# Altium PCB DragonFly.PcbDoc (part 1 of 2)
Units mil, origin at the board's own origin, x right, y up, seen from the top; angles counter-clockwise.
Board outline 3771.33 x 3716.36 mil, 4 copper layers (Top Layer, Signal Layer 1, Signal Layer 2, Bottom Layer), stack 47.519 mil thick; 111 components, 70 nets, 378 pads, 144 vias.
Unrouted connection lines stored in the file: 86.
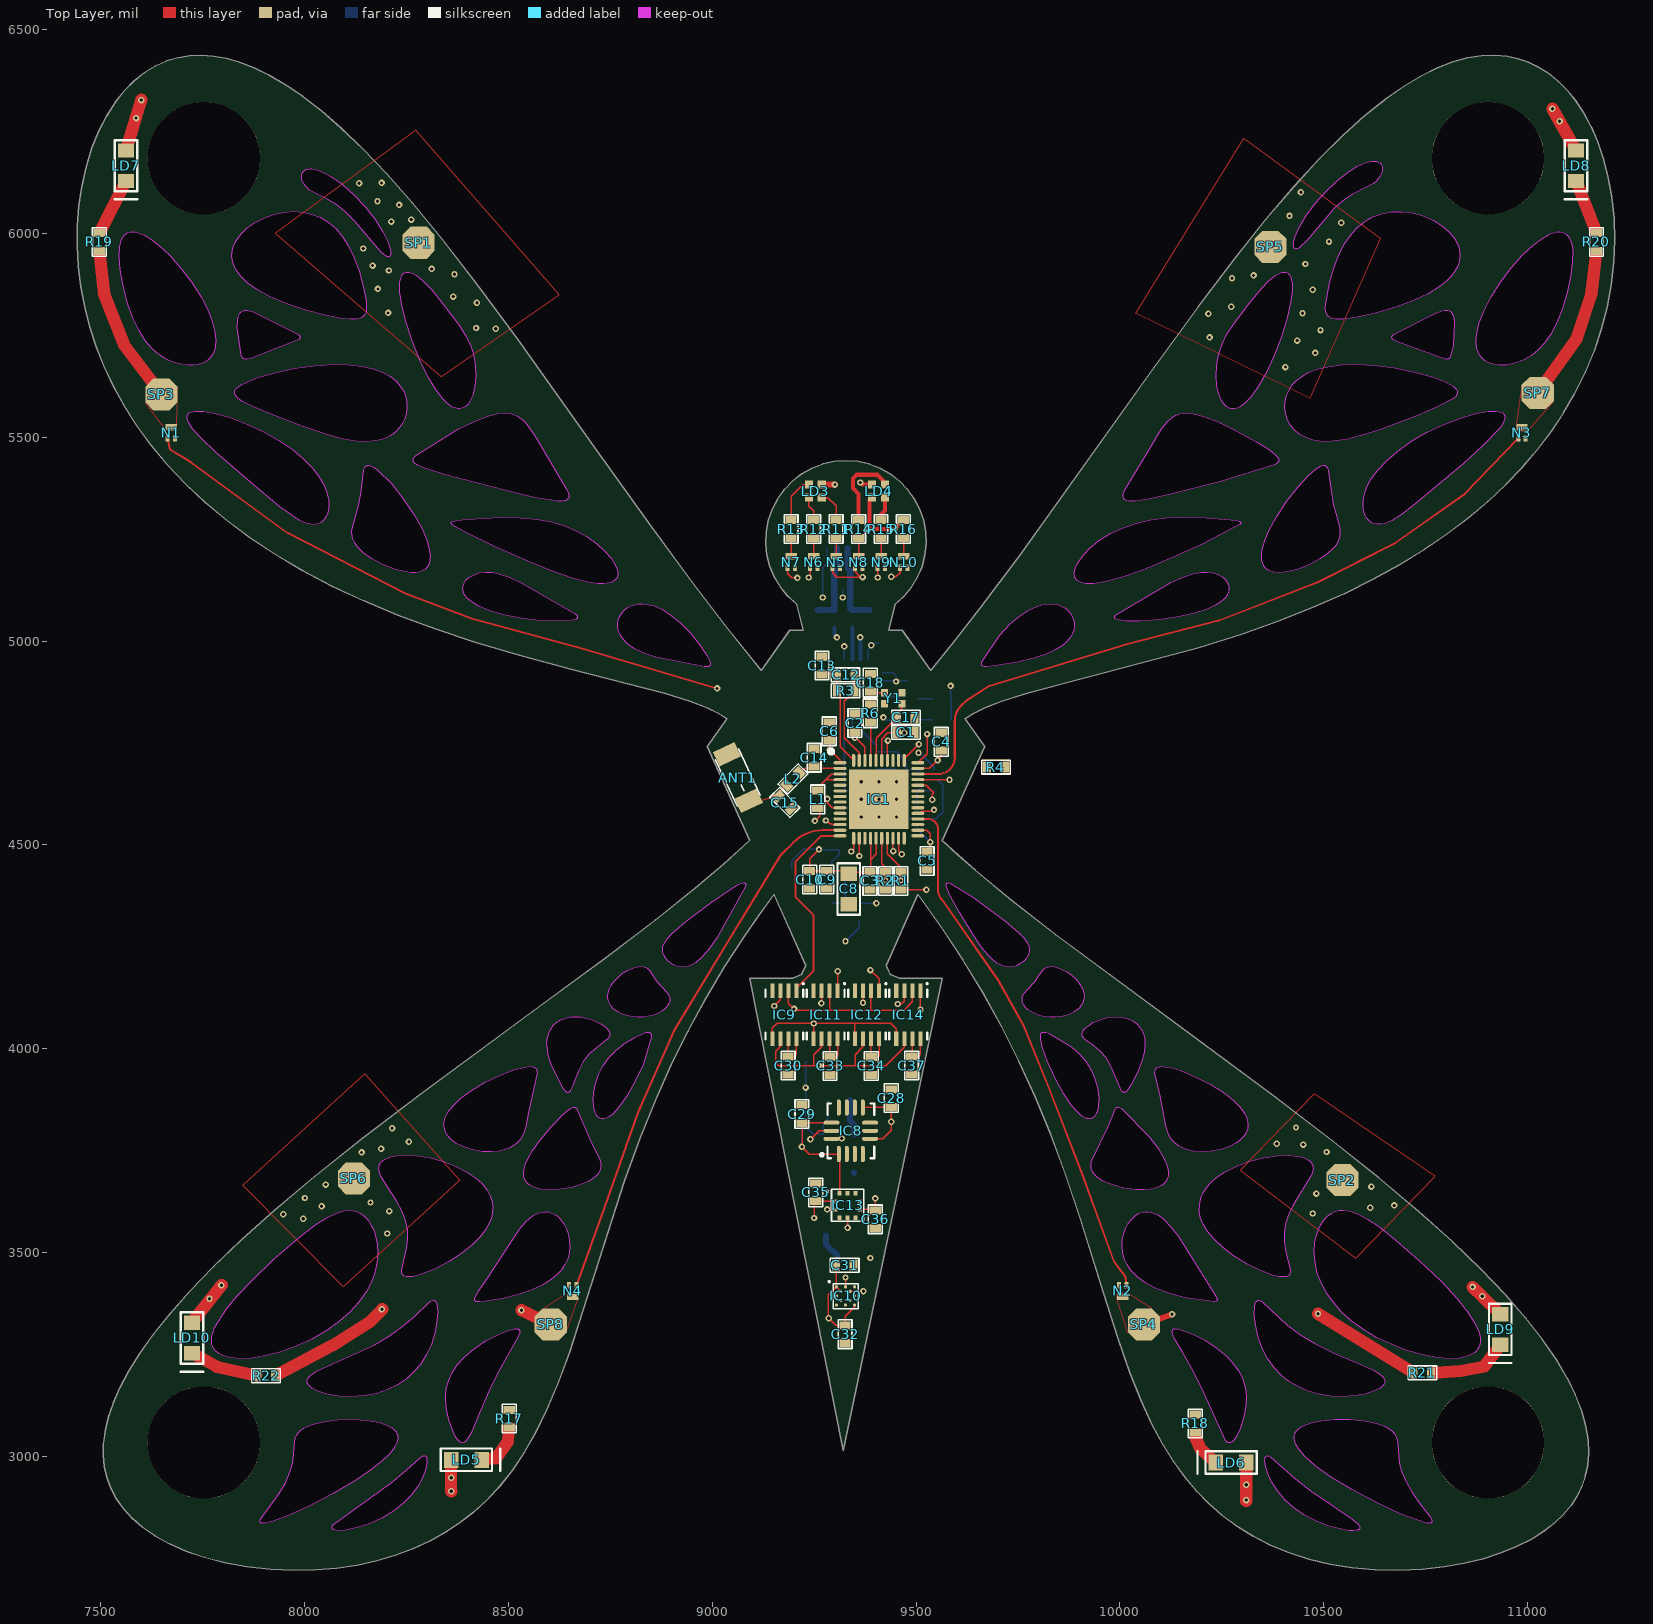
[diagram p0: Top Layer view]
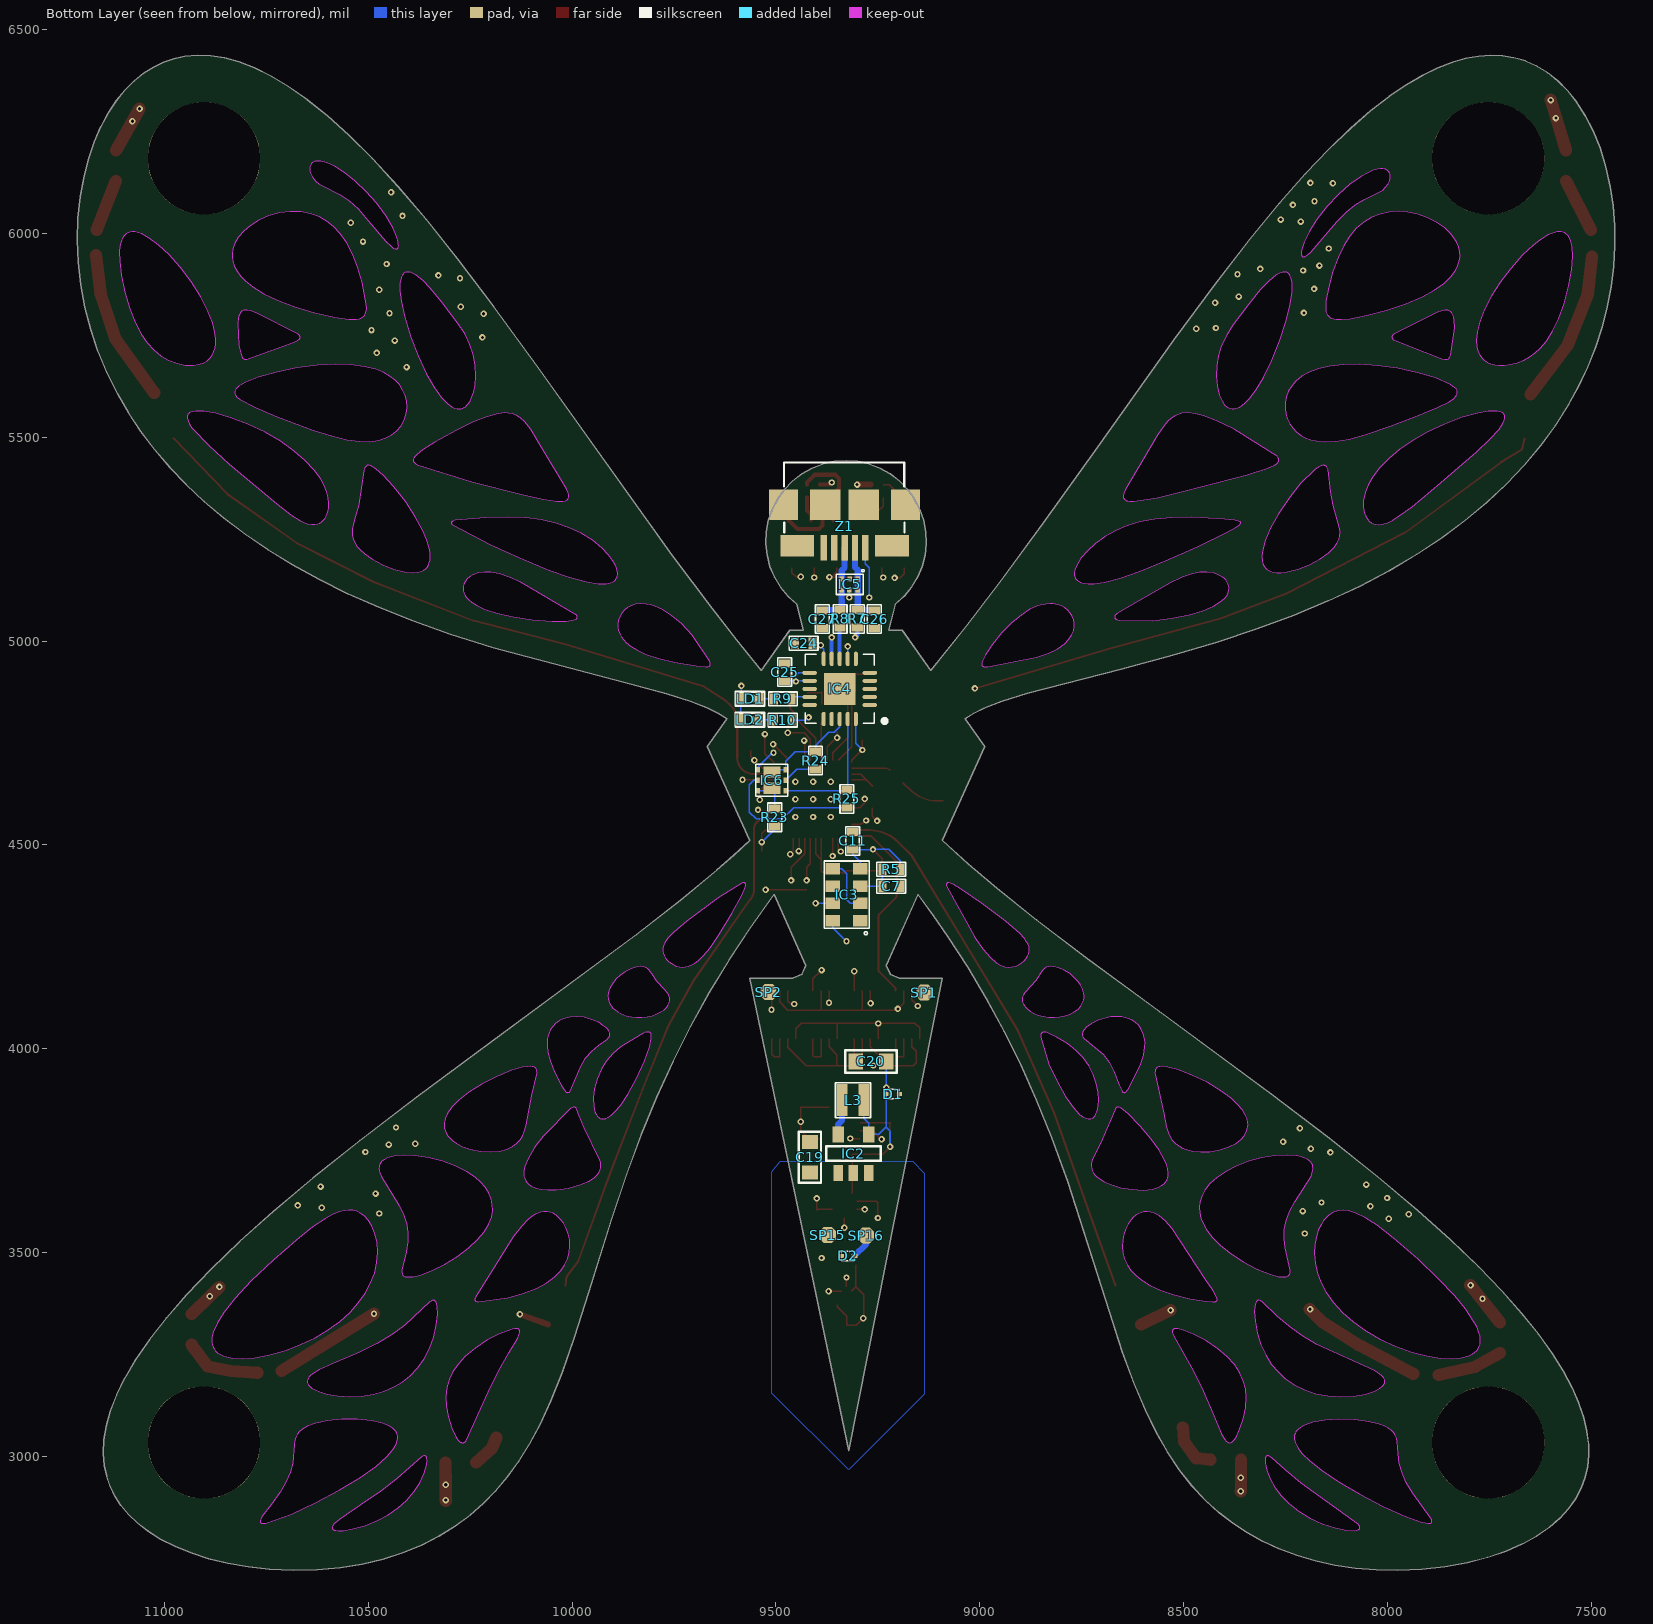
[diagram p1: Bottom Layer view, seen from below]
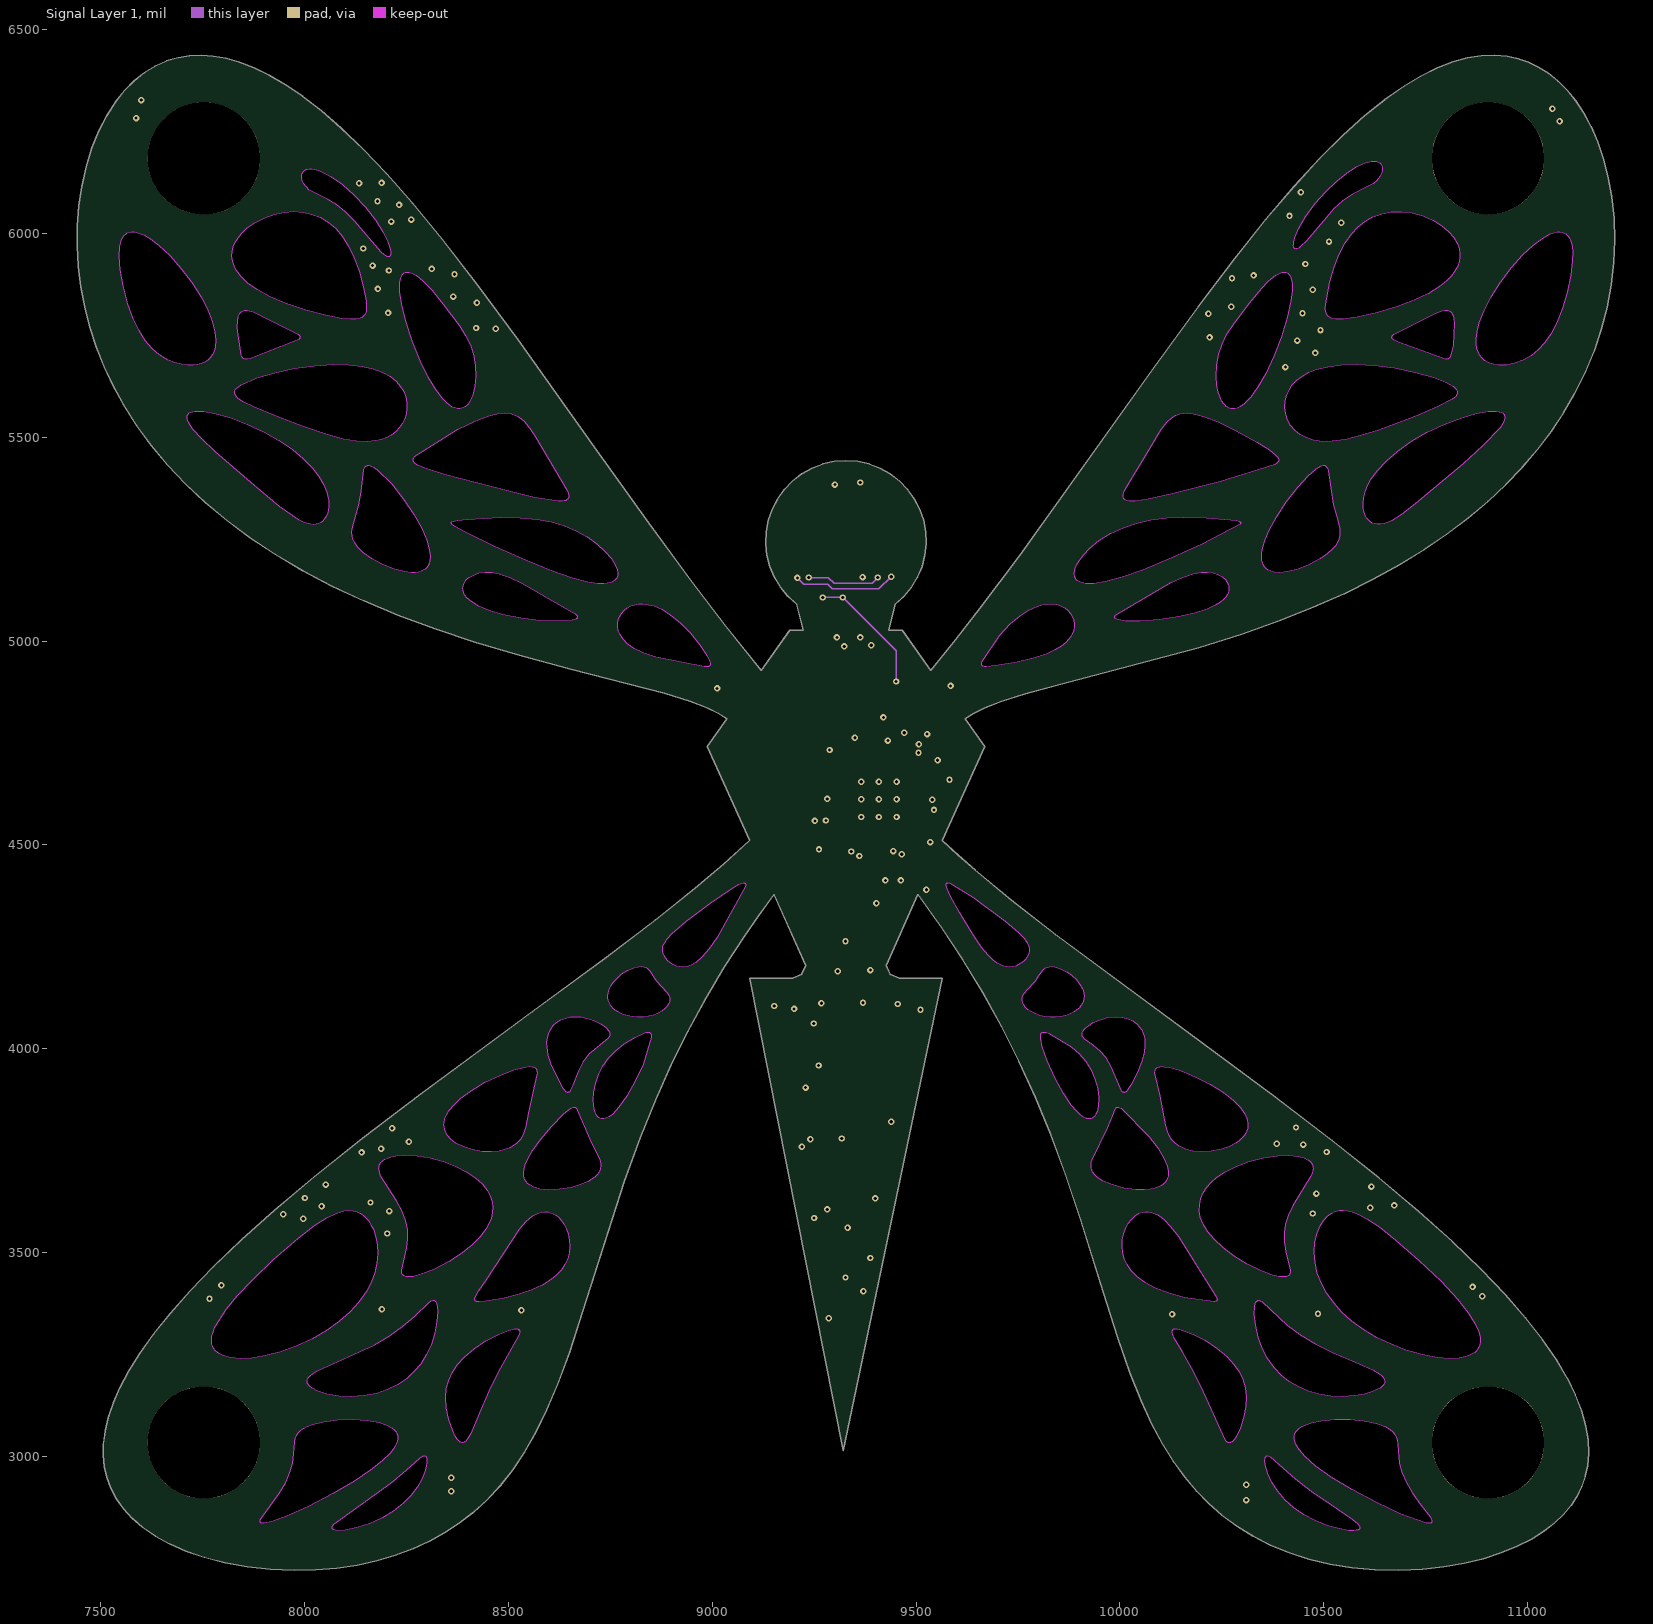
[diagram p2: Signal Layer 1]
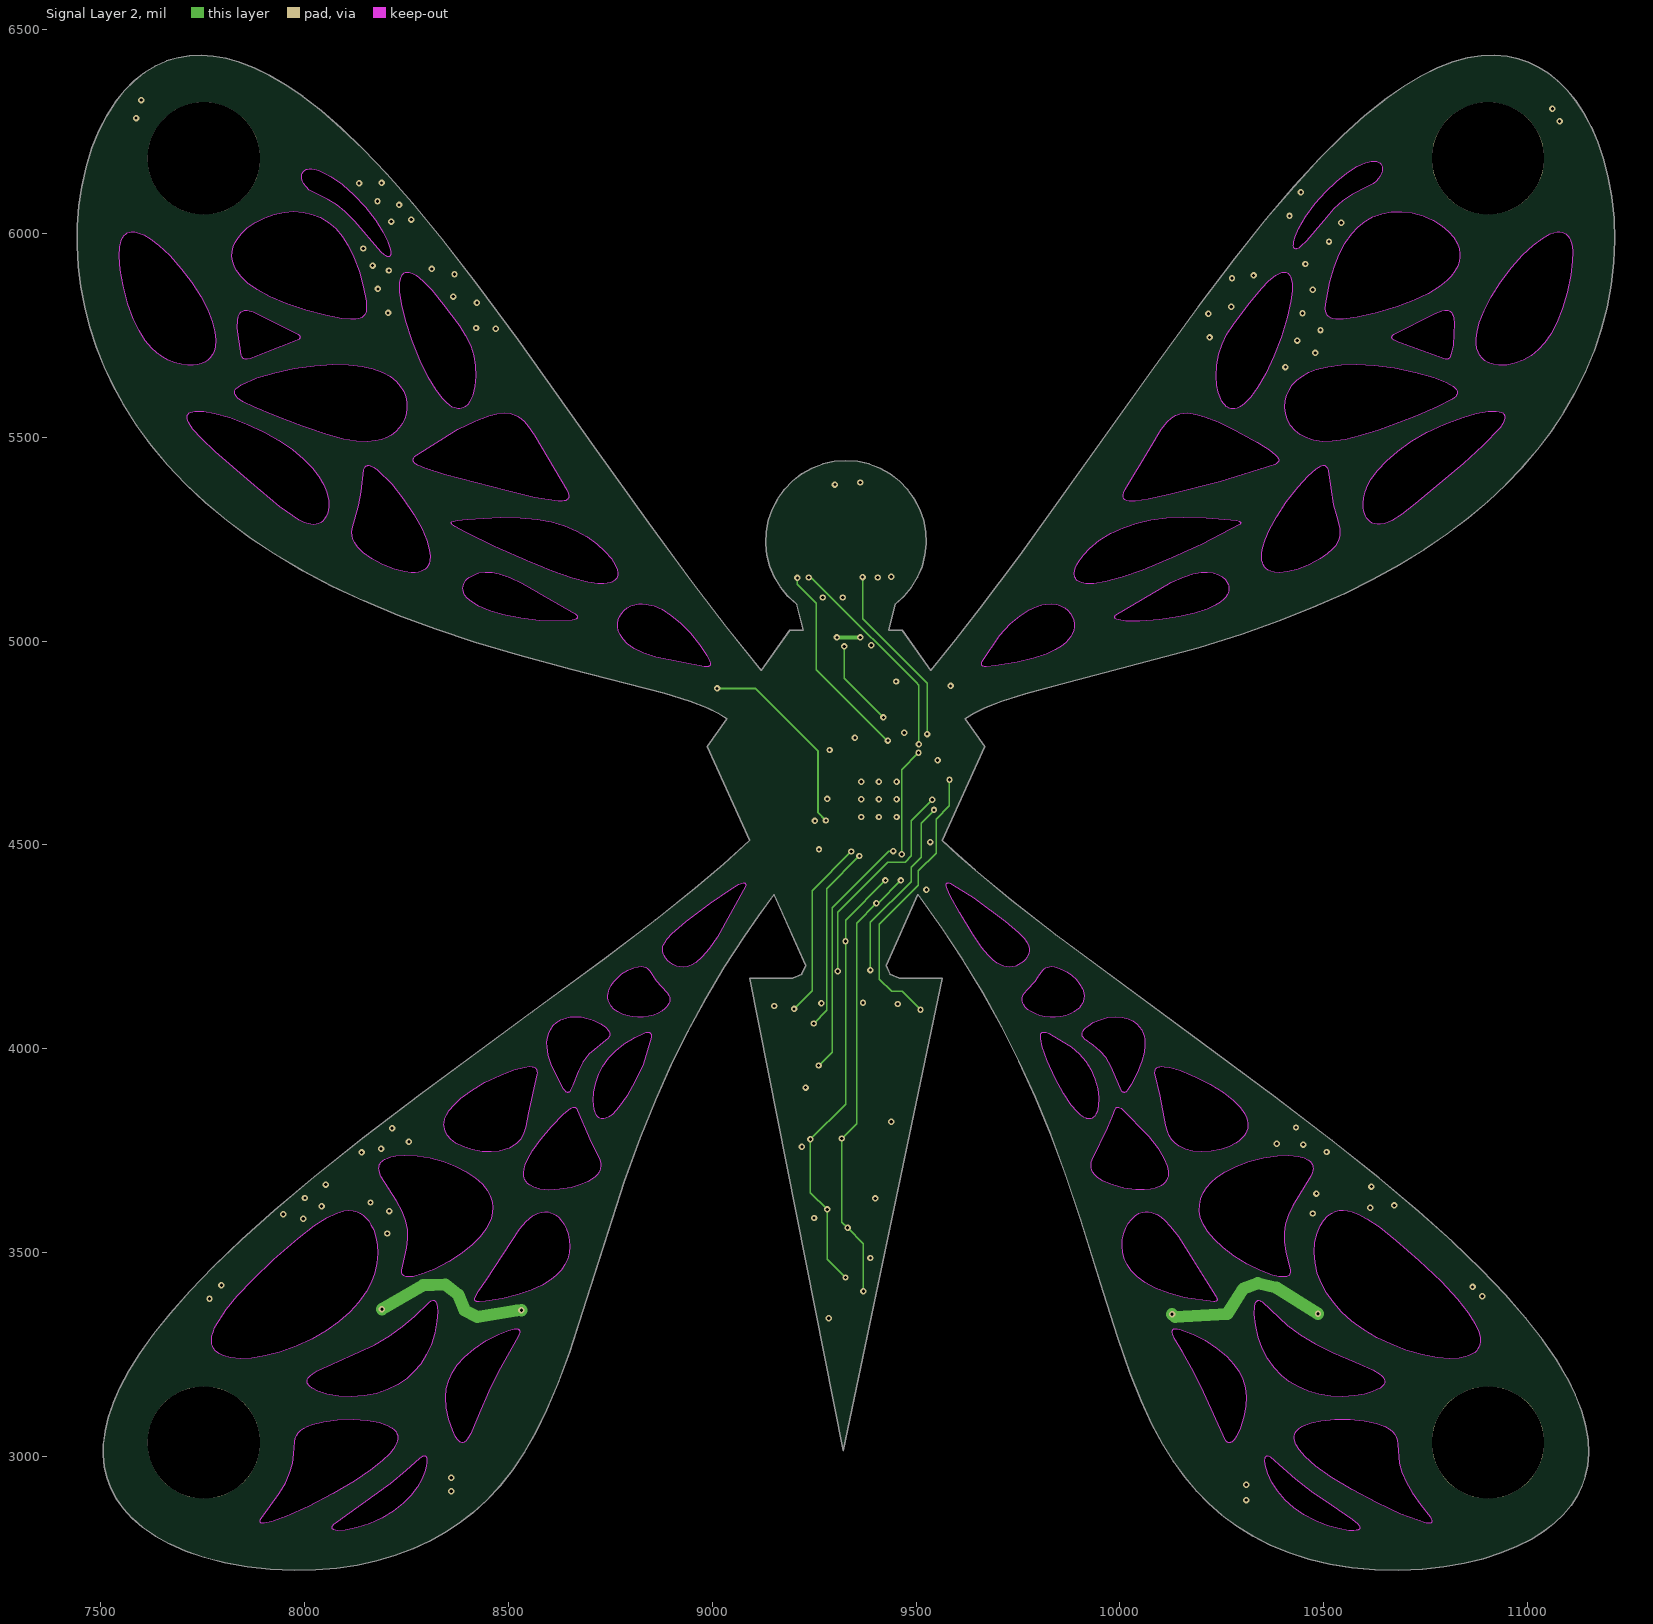
[diagram p3: Signal Layer 2]
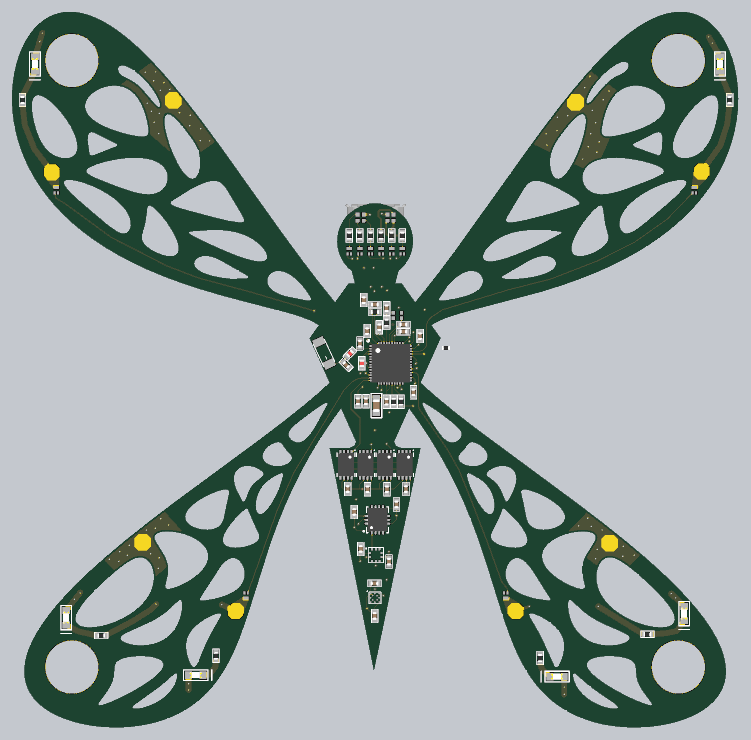
[diagram p5: 3D render of the assembled board from above, using the file's embedded part models]
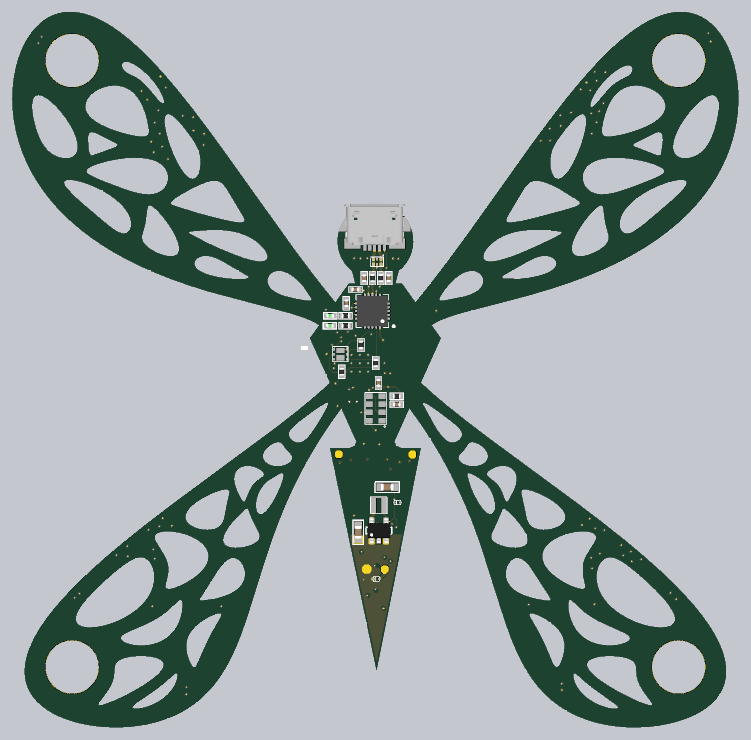
[diagram p6: 3D render of the assembled board from below, using the file's embedded part models]

## Layer stack, top to bottom
Top Solder: solder mask 0.4, Solder Resist, Dk 3.5
Top Layer: signal copper 1.378
Dielectric 1: core 7.874, FR-4, Dk 4.2
Signal Layer 1: signal copper 1.417
Dielectric 3: prepreg 26.181, Dk 4.2
Signal Layer 2: signal copper 1.417
Dielectric 2: core 7.874, Dk 4.2
Bottom Layer: signal copper 1.378
Bottom Solder: solder mask 0.4, Solder Resist, Dk 3.5

## Board outline
329 vertices, not listed, extent 7442.55,2720.73 11213.88,6437.09
cut-out: 10875.29,3259.91 10869.92,3254.92 10863.31,3250.62 10855.5,3247.05 10846.55,3244.22 10832.92,3241.61 10809.2,3240.24 10778.05,3242.45 10741.54,3249.15 10701.7,3260.63 10665.23,3274.76 10630.14,3291.88 10597.85,3311.27 10569.2,3332.27 10544.58,3354.31 10524.06,3376.99 10507.5,3400.03 10494.69,3423.28 10484.57,3449.24 10478.58,3475.16 10476.58,3500.69 10478.46,3525.28 10483.96,3548.04 10491.65,3566.03 10500.33,3579.55 10510.39,3590.27 10519.4,3596.77 10528.37,3600.98 10537.92,3603.43 10548.02,3604.12 10558.71,3603.05 10569.98,3600.26 10585.99,3593.97 10605.41,3583.55 10635.56,3563.3 10676.76,3530.98 10733.55,3481.5 10787.66,3429.74 10827.76,3386.62 10854.28,3353.18 10870.82,3327.1 10880.03,3306.62 10883.65,3291.99 10884.12,3282.04 10882.99,3274.45 10880.78,3268.22 10878.36,3263.89
cut-out: 10832.7,5932.32 10828.61,5919.58 10821.94,5907.13 10812.8,5895.08 10801.36,5883.49 10782.91,5868.89 10756.12,5852.45 10721.95,5836.02 10680.06,5820.02 10631.6,5805.37 10582.16,5794.09 10547.62,5789.4 10529.09,5789.53 10522.4,5790.73 10518.14,5792.14 10514.2,5794.22 10511.19,5796.64 10508.98,5799.26 10507.23,5802.31 10505.9,5805.79 10504.97,5809.7 10504.3,5815.62 10504.43,5826 10514.36,5879.73 10525.64,5917.38 10538.21,5949.08 10552.95,5977.1 10568.41,5999.13 10584.73,6016.56 10602.04,6030.21 10620.47,6040.58 10642.47,6048.58 10666.11,6052.94 10691.26,6053.54 10717.42,6050.22 10743.69,6042.92 10768.73,6031.9 10788.88,6019.38 10805.74,6005.16 10818.68,5990.08 10827.18,5975.69 10832.04,5962.31 10834.01,5950.1 10833.98,5941.19
cut-out: 10722.64,5550.81 10634.58,5517.65 10590.05,5503.26 10552.98,5494.11 10521.35,5489.65 10495.89,5489.4 10474.67,5492.44 10456.73,5498.27 10442.37,5506.02 10429.93,5516.07 10419.67,5528.24 10411.86,5542.24 10406.79,5557.67 10404.77,5574.06 10405.79,5589.16 10409.18,5602.68 10415.02,5615.82 10423.39,5628.28 10434.32,5639.79 10447.8,5650.1 10463.78,5659.01 10482.13,5666.35 10509.91,5673.56 10542.89,5677.96 10581.5,5679.13 10625.69,5676.61 10674.42,5670.08 10724.71,5659.67 10770.2,5646.62 10800,5634.89 10817.31,5624.91 10822.37,5620.54 10825.06,5617.3 10826.46,5614.91 10827.33,5612.56 10827.69,5610.41 10827.64,5608.42 10827.24,5606.44 10826.48,5604.47 10825.39,5602.5 10823.41,5599.87 10820.49,5596.91 10815.51,5592.93 10777.62,5573.18
cut-out: 10473.75,3706.74 10473.21,3701.28 10471.73,3695.47 10468.43,3687.2 10423.89,3615.38 10412.68,3591.88 10405.7,3569.63 10402.64,3548.93 10403.02,3526.32 10407.03,3502.6 10417.93,3456.91 10417.77,3451.64 10417.04,3448.6 10416.14,3446.62 10415.01,3445.02 10413.61,3443.66 10411.65,3442.38 10409.29,3441.4 10406.52,3440.72 10403.35,3440.35 10398.48,3440.34 10389.83,3441.35 10374.03,3445.17 10345.05,3455.89 10312.93,3471.58 10280.82,3491.06 10253.04,3511.85 10231.18,3532.35 10215.15,3551.85 10204.25,3570.17 10197.72,3587.42 10195,3602.84 10195.31,3617.99 10198.59,3632.72 10204.72,3646.88 10213.5,3660.34 10224.71,3672.98 10238.05,3684.69 10258.61,3698.71 10285.58,3712.55 10316.95,3724.31 10351.2,3733.09 10385.67,3738.04 10413.91,3738.87 10436.99,3736.51 10452.3,3732.34 10461.19,3727.97 10466.31,3724.05 10469.56,3720.38 10471.68,3716.76 10473.06,3712.88 10473.59,3709.88
cut-out: 11072.31,6003.5 11078.71,6003.86 11084.53,6003.15 11089.26,6001.61 11093.11,5999.49 11096.56,5996.71 11099.61,5993.28 11102.28,5989.23 11104.56,5984.58 11107,5977.51 11108.98,5968.44 11110.39,5954.71 11110.12,5931.24 11106.04,5897 11097.22,5855.37 11085.42,5815.67 11071.61,5780.56 11057.2,5752.91 11042.27,5731.34 11026.46,5714.22 11009.41,5700.5 10988.76,5688.73 10968.87,5681.29 10948.71,5677.17 10929.79,5676.6 10915.43,5678.79 10903.7,5682.95 10895.3,5687.89 10888.57,5693.77 10882.98,5700.9 10878.65,5709.3 10875.68,5718.94 10874.13,5729.77 10874.05,5741.75 10876.24,5759.32 10881.78,5781 10893.24,5810.79 10910.59,5844.68 10933.72,5881.2 10961.41,5917.63 10988.1,5947.27 11013.92,5971.3 11036.82,5988.37 11055.75,5998.63 11064.36,6001.76
cut-out: 10166.44,5559.53 10186.38,5557.04 10208.66,5550.89 10240.91,5538.2 10283.53,5517.5 10336.74,5487.86 10366.4,5469.04 10381.03,5457.63 10386.28,5451.98 10388.3,5448.78 10389.19,5446.5 10389.53,5444.65 10389.51,5443.15 10389.23,5441.7 10388.57,5440.07 10387.56,5438.47 10386.18,5436.89 10383.78,5434.81 10380.29,5432.47 10245.95,5390.69 10120.24,5358.43 10070,5347.66 10037.83,5343.27 10022.79,5343.36 10017.16,5344.43 10013.86,5345.7 10011.9,5346.92 10010.7,5347.98 10009.66,5349.29 10008.88,5350.79 10008.37,5352.45 10008.13,5354.27 10008.15,5356.24 10008.56,5359.1 10009.94,5363.87 10013.51,5372.07 10074.95,5474.86 10101.53,5519.59 10115.76,5537.84 10127.38,5548.2 10136.93,5553.86 10146.58,5557.39 10156.11,5559.14
cut-out: 10765.13,2842.23 10765.24,2840.75 10765.12,2839.69 10764.87,2838.91 10764.53,2838.28 10764.07,2837.72 10763.5,2837.24 10762.81,2836.83 10762.01,2836.49 10760.75,2836.16 10759.09,2835.93 10756.46,2835.9 10751.63,2836.4 10688.53,2858.31 10629.46,2886.08 10570.1,2917.97 10518.82,2949.38 10480.8,2976.57 10455.22,2998.87 10439.44,3016.84 10431.56,3029.87 10428.56,3038.13 10427.53,3044.64 10427.72,3049.79 10428.7,3054.2 10430.46,3058.39 10432.98,3062.35 10436.25,3066.06 10440.25,3069.54 10446.69,3073.79 10455.35,3078.02 10469.02,3082.77 10493.27,3087.97 10526.56,3091.2 10565.3,3091.08 10599.84,3087.7 10628.67,3081.77 10649.55,3074.33 10662.22,3067.03 10669.32,3060.82 10674.2,3054.54 10677.65,3047.74 10679.91,3040.45 10681.56,3029.98 10685.52,2983.73 10691.42,2961.26 10701.86,2937.15 10717.17,2911.42 10738.42,2882.18 10760.81,2851.89 10763.71,2846.54 10764.61,2844.25
cut-out: 10938.58,5559.53 10940.77,5557.76 10942.16,5556.12 10943.12,5554.45 10943.79,5552.61 10944.15,5550.63 10944.21,5548.5 10943.98,5546.22 10943.21,5542.96 10941.73,5538.99 10938.78,5533.23 10932.36,5523.62 10890.15,5478.82 10841.73,5435.58 10724.91,5336.68 10690.4,5310.16 10667.3,5295.71 10649.44,5288.18 10638.85,5286.07 10630.71,5286.07 10624.42,5287.32 10619.17,5289.4 10614.34,5292.37 10609.97,5296.22 10606.11,5300.91 10602.82,5306.41 10600.16,5312.68 10598.2,5319.66 10597,5327.31 10596.68,5338.44 10598.27,5352.08 10602.07,5366.67 10608.25,5382 10616.9,5397.83 10632.31,5419.32 10653.96,5442.66 10681.4,5466.26 10714.68,5489.63 10753.28,5511.96 10795.66,5532.05 10838.76,5548.32 10874.33,5558.36 10903.13,5563.37 10923.28,5563.86 10930.64,5562.74 10935.03,5561.36
cut-out: 10257.5,5298.99 10286.27,5295.88 10292.41,5294.29 10294.32,5293.39 10295.26,5292.71 10295.77,5292.16 10296.07,5291.67 10296.23,5291.24 10296.31,5290.8 10296.29,5290.26 10296.15,5289.65 10295.87,5288.97 10295.45,5288.26 10294.67,5287.25 10293.01,5285.58 10202.25,5237.6 10128.82,5204.22 10056.18,5174.32 10005.3,5156.47 9964.4,5145.45 9935.77,5141 9916.13,5141.05 9906.03,5143.06 9899.95,5145.56 9895.86,5148.27 9893.13,5150.93 9891.2,5153.63 9889.76,5156.61 9888.81,5159.83 9888.33,5163.3 9888.31,5166.98 9888.99,5172.2 9890.69,5178.44 9894.4,5187.25 9900.42,5197.64 9911.15,5211.87 9926.42,5227.78 9949.92,5246.99 9977.36,5264.24 10007.64,5278.59 10040.25,5289.71 10075.22,5297.56 10113.11,5302.22 10155.32,5303.79 10211.28,5302.05
cut-out: 10382.31,5897.07 10389.96,5901.55 10397.19,5904.38 10402.1,5905.24 10405.54,5905.16 10408.23,5904.58 10410.56,5903.61 10412.72,5902.19 10414.69,5900.33 10416.48,5898 10418.05,5895.2 10419.4,5891.9 10420.85,5886.73 10422.19,5877.27 10422.2,5859.25 10419.13,5833.63 10410.39,5793.96 10395.41,5745.32 10377.42,5698.8 10357.52,5656.36 10338.09,5622.48 10320.6,5598.3 10305.53,5582.74 10295.15,5575.24 10287.74,5571.73 10281.86,5570.16 10276.68,5569.79 10272.24,5570.3 10268.44,5571.43 10264.83,5573.15 10261.42,5575.45 10258.22,5578.28 10254.27,5582.82 10250.28,5588.89 10245.73,5598.32 10241.67,5610.39 10237.99,5628.14 10236.18,5649.19 10237.3,5676.56 10242.18,5703.11 10250.58,5728.01 10262.65,5752.29 10279.9,5779.1 10318.5,5830.35 10348.24,5865.84 10365.48,5883.46
cut-out: 10649.43,3181.22 10648.49,3178.67 10647.01,3176.15 10644.99,3173.64 10642.44,3171.18 10638.24,3167.95 10630.26,3163.32 10619.04,3158.5 10600.77,3153.02 10576.45,3148.6 10546.93,3146.56 10516.9,3147.91 10488.14,3152.56 10461.55,3160.24 10437.46,3170.62 10415.92,3183.47 10396.83,3198.62 10378.38,3218.06 10362.68,3240.25 10349.69,3265.23 10339.59,3292.7 10332.8,3321.57 10329.86,3349.09 10330.71,3368.41 10332.06,3374.6 10333.45,3378.15 10334.68,3380.18 10335.73,3381.35 10336.57,3382.02 10337.56,3382.57 10338.64,3382.92 10339.8,3383.06 10341.03,3382.99 10342.33,3382.72 10343.71,3382.25 10345.67,3381.32 10348.88,3379.3 10410.94,3322.34 10442.09,3299.16 10478.75,3276.83 10520.6,3255.77 10587.22,3227.14 10619.95,3212.32 10635.64,3203.21 10642.08,3198.17 10645.68,3194.42 10647.66,3191.6 10649,3188.84 10649.68,3186.28 10649.83,3183.92 10649.71,3182.57
cut-out: 10313.82,3818.26 10314.08,3811.57 10313.33,3805.08 10311.57,3798.81 10308.85,3792.79 10305.2,3787.04 10300.67,3781.6 10293.37,3774.85 10283.62,3768.02 10268.52,3760.27 10249.43,3753.58 10223.9,3748.46 10200.25,3747.11 10178.41,3749.03 10159.94,3753.82 10145.82,3760.53 10135.34,3768.38 10127.71,3776.82 10121.66,3786.42 10116.97,3797.04 10112.35,3812.49 10098.82,3884.45 10085.93,3941.01 10086.29,3945.81 10087.06,3948.58 10088.08,3950.59 10089.19,3952.05 10090.71,3953.43 10092.6,3954.59 10094.84,3955.51 10097.44,3956.16 10101.48,3956.63 10108.76,3956.48 10122.35,3954.32 10148.13,3946.89 10185.08,3931.99 10221.14,3913.61 10253.03,3893.58 10277.72,3874.19 10295.1,3856.42 10306.18,3840.54 10311.32,3829.12 10312.89,3823.65
cut-out: 10493.34,5429.74 10497.13,5430.8 10499.85,5431.02 10501.89,5430.78 10503.56,5430.24 10505.07,5429.41 10506.44,5428.28 10507.66,5426.87 10508.75,5425.19 10510.01,5422.55 10511.55,5417.79 10522.84,5334.42 10531.36,5304.5 10538.78,5277.29 10539.76,5268.23 10539.27,5258.44 10537.01,5249.4 10533.32,5241.24 10527.91,5233.03 10520.75,5224.78 10508.53,5213.82 10491.52,5201.85 10464.35,5187.15 10437.36,5176.42 10412.13,5169.88 10391.4,5167.8 10378.46,5168.85 10370.04,5171.11 10363.97,5174 10359.17,5177.47 10355.2,5181.73 10352.08,5186.74 10349.81,5192.49 10348.41,5198.94 10347.87,5206.07 10348.46,5216.54 10350.83,5229.51 10356.64,5248.44 10366.35,5271.4 10384.26,5304.71 10408.66,5342.07 10437.24,5379.15 10462.03,5406.22 10481.27,5422.88 10487.7,5427.05
cut-out: 10209.44,3434.39 10236.76,3391.73 10238,3388.68 10238.51,3386.7 10238.64,3385.39 10238.59,3384.5 10238.39,3383.62 10238.06,3382.88 10237.69,3382.32 10237.1,3381.71 10236.18,3381.07 10234.87,3380.47 10233.27,3380 10230.66,3379.58 10157.92,3389.95 10119.58,3400.55 10086.78,3413.25 10061.86,3426.61 10042.78,3440.62 10028.36,3455.26 10017.79,3470.57 10011.05,3485.29 10006.96,3500.59 10005.44,3516.12 10006.34,3531.46 10009.44,3546.19 10014.46,3559.88 10021.1,3572.11 10029.06,3582.51 10038.02,3590.76 10046.73,3596.12 10054.92,3599.19 10062.5,3600.48 10069.43,3600.44 10076.42,3599.28 10083.43,3597.03 10090.45,3593.72 10099.77,3587.74 10110.17,3579.05 10123.83,3564.67 10143.79,3538.48 10178.42,3484.14
cut-out: 10118.09,3687.99 10116.67,3682.21 10114.33,3676.94 10111.06,3672.19 10106.91,3668 10101.92,3664.35 10096.14,3661.25 10087.31,3657.96 10076.04,3655.4 10059.29,3653.77 10038.9,3654.19 10009.82,3658.21 9980.86,3666.04 9959.47,3675.16 9945.87,3683.83 9938.36,3690.86 9933.9,3697.05 9931.26,3702.84 9929.84,3708.86 9929.57,3715.1 9930.34,3721.56 9932.02,3728.25 9970.84,3806.23 9982.27,3835.42 9988.24,3851.96 9989.37,3853.9 9990.29,3855.06 9991.28,3855.96 9992.17,3856.52 9993.17,3856.9 9994.24,3857.08 9995.58,3857.04 9997.62,3856.58 9999.7,3855.74 10002.87,3854 10070.82,3786.15 10092.55,3757.27 10107.88,3731.5 10115.84,3711.72 10118.33,3699.25 10118.56,3693.44
cut-out: 10264.99,3034.41 10263.02,3035.49 10261.05,3037.05 10259.07,3039.06 10205.73,3157.69 10180.9,3207.94 10153.6,3255.73 10133.8,3290.28 10129.82,3299.57 10128.58,3304.56 10128.44,3307.07 10128.67,3308.7 10129.07,3309.88 10129.62,3310.83 10130.33,3311.64 10131.24,3312.34 10132.21,3312.84 10133.33,3313.24 10135.05,3313.6 10137.3,3313.76 10140.79,3313.59 10147.07,3312.54 10179.95,3300.44 10209.2,3284.91 10237.97,3265.76 10261.69,3245.92 10279.66,3226.59 10292.66,3207.87 10301.63,3189.39 10307.66,3168.58 10310.02,3146.78 10308.82,3123.17 10303.9,3097.03 10295.16,3069.46 10285.43,3048.78 10280.64,3041.65 10277.07,3037.71 10274.41,3035.59 10272.43,3034.5 10270.95,3033.97 10269.34,3033.67 10267.68,3033.69 10266.34,3033.94
cut-out: 9817.77,5090.88 9832.47,5091.59 9844.85,5089.92 9855.09,5086.64 9864.27,5081.81 9872.2,5075.6 9878.7,5068.22 9883.61,5059.87 9886.79,5050.8 9888.06,5042.21 9887.86,5034.3 9886.36,5026.33 9883.52,5018.43 9879.36,5010.71 9873.89,5003.25 9867.15,4996.16 9856.3,4987.35 9841.8,4978.45 9819.42,4968.29 9788.4,4958.15 9748.09,4948.55 9696.01,4939.04 9672.48,4936.66 9667.06,4937.14 9664.59,4937.88 9663.56,4938.4 9662.61,4939.09 9661.9,4939.83 9661.43,4940.54 9661.01,4941.5 9660.77,4942.5 9660.66,4943.6 9660.72,4945.24 9661.08,4947.3 9662,4950.44 9705.67,5014.9 9731.62,5042.24 9755.84,5062.69 9777.87,5076.92 9797.86,5085.94 9807.91,5088.97
cut-out: 10228.88,5167.16 10241.89,5162.6 10251.07,5157.28 10258.12,5151.21 10262.58,5145.59 10265.53,5139.91 10267.11,5134.48 10267.58,5129.39 10267.06,5124.14 10265.51,5118.8 10262.88,5113.4 10259.12,5107.99 10254.2,5102.62 10245.83,5095.61 10233.92,5088.02 10214.13,5078.62 10183.51,5068.29 10144.24,5059.24 10097.47,5052.35 10048.99,5048.81 10014.03,5049.25 9996.16,5051.88 9991.05,5053.73 9989.11,5054.91 9988.05,5055.87 9987.42,5056.72 9987.06,5057.46 9986.88,5058.11 9986.81,5058.91 9986.88,5059.69 9987.08,5060.49 9987.41,5061.32 9988.04,5062.46 9989,5063.8 10126.26,5143.87 10154.57,5157.1 10178.17,5165.22 10199.18,5169.1 10214.49,5169.36
cut-out: 9719.25,4312.46 9750.61,4286.18 9765.47,4270.74 9773.04,4259.78 9776.43,4251.92 9777.75,4245.54 9777.77,4239.76 9776.69,4234.09 9774.53,4228.56 9771.39,4223.21 9767.33,4218.15 9762.46,4213.46 9756.89,4209.28 9750.72,4205.76 9744.06,4203.03 9737.03,4201.23 9729.73,4200.5 9722.23,4200.95 9714.6,4202.65 9706.91,4205.67 9699.18,4210.01 9688.83,4217.84 9677.14,4229.29 9661.45,4248.4 9638.85,4281.32 9606.62,4334.03 9583.88,4375.04 9575.98,4393.03 9574.2,4400.1 9574.08,4402.13 9574.19,4403.44 9574.39,4404.29 9574.72,4405.09 9575.13,4405.72 9575.56,4406.15 9576.1,4406.54 9576.75,4406.85 9577.49,4407.05 9578.32,4407.16 9579.56,4407.16 9581.15,4406.95 9583.57,4406.35 9641.85,4370.53
cut-out: 10060.69,4023.76 10061.46,4007.82 10059.48,3991.28 10053.47,3968.99 10042.58,3941.89 10026.45,3910.4 10019.64,3899.88 10015.52,3895.22 10013.91,3893.96 10012.75,3893.3 10011.89,3892.97 10010.98,3892.78 10010.15,3892.76 10009.47,3892.86 10008.65,3893.13 10007.9,3893.52 10007.17,3894.05 10006.19,3894.98 10005.1,3896.31 9979.24,3956.61 9966.26,3977.61 9951.27,3994.64 9934.49,4008.46 9913.29,4024.05 9909.78,4027.95 9908.19,4030.63 9907.39,4032.93 9907.1,4034.91 9907.19,4037.13 9907.73,4039.49 9908.72,4041.92 9910.16,4044.42 9912.77,4047.83 9916.6,4051.76 9923.07,4057.01 9935.28,4064.55 9951.7,4071.81 9969.73,4076.87 9988.14,4079.02 10005.84,4077.9 10020.45,4074.04 10032.08,4068.38 10041.06,4061.68 10047.82,4054.48 10053.24,4046.34 10057.29,4037.41 10059.33,4030.72
cut-out: 9917.31,3829.37 9911.11,3832.25 9904.53,3836.74 9895.29,3845.08 9880.78,3862.13 9862.14,3889.91 9841.61,3927.34 9822.16,3970.33 9810,4004.55 9805.62,4024.24 9805.29,4030.75 9805.76,4034.54 9806.42,4036.57 9807.18,4037.96 9807.87,4038.82 9808.75,4039.59 9809.78,4040.2 9810.93,4040.63 9812.21,4040.89 9813.62,4040.98 9815.68,4040.85 9819.15,4040.18 9825.16,4038.17 9881.04,4004.87 9900,3988.33 9915.91,3969.94 9928.24,3950.48 9938.55,3926.98 9945.28,3901.85 9947.89,3879.36 9947.08,3859.46 9944.03,3846.01 9940.9,3838.94 9937.99,3834.69 9935.21,3831.9 9932.37,3829.97 9929.6,3828.79 9926.93,3828.19 9924.12,3828.05 9921.17,3828.35 9919.26,3828.77
cut-out: 9911.45,4136.51 9912.11,4129.9 9911.72,4123.42 9910.28,4117.12 9907.79,4111.09 9904.3,4105.4 9899.86,4100.09 9894.53,4095.23 9888.39,4090.87 9879.12,4085.9 9867.48,4081.58 9854.92,4078.69 9841.86,4077.27 9828.7,4077.32 9815.85,4078.82 9803.69,4081.64 9792.56,4085.65 9782.76,4090.62 9774.53,4096.3 9768.06,4102.45 9763.84,4108.17 9761.35,4113.33 9760.16,4117.89 9759.91,4121.88 9760.4,4125.75 9761.55,4129.48 9763.29,4133.07 9766.38,4137.69 9772.22,4144.35 9792.73,4166.1 9801.26,4178.78 9810.77,4192.89 9814.19,4196.23 9818.07,4198.88 9822.2,4200.68 9826.54,4201.7 9833.2,4202.02 9839.95,4201.23 9847.31,4199.38 9857.82,4195.33 9870.07,4188.72 9882.05,4180.18 9892.96,4170.06 9901.99,4158.78 9907.93,4148 9910.06,4142.26
cut-out: 10588.12,2823.01 10587.56,2822.18 10586.8,2821.43 10585.86,2820.74 10584.73,2820.12 10582.93,2819.42 10579.62,2818.61 10573.34,2817.98 10561.18,2818.39 10537.76,2822.26 10508.85,2830.57 10478.93,2842.77 10451.1,2857.77 10426.67,2874.69 10405.98,2892.94 10387.29,2914.34 10372.83,2936.54 10362.59,2958.81 10356.92,2979.25 10355.89,2990.92 10356.31,2995.41 10357.03,2998.04 10357.78,2999.59 10358.47,3000.51 10359.05,3001.05 10359.75,3001.52 10360.54,3001.84 10361.4,3002.02 10362.33,3002.05 10363.34,3001.93 10364.42,3001.66 10365.97,3001.08 10368.55,2999.74 10430.37,2945.85 10469.94,2915.1 10518.94,2881.35 10570.3,2846.26 10582.86,2835.37 10586.62,2830.78 10587.98,2828.31 10588.53,2826.62 10588.67,2825.44 10588.6,2824.43 10588.42,2823.7
cut-out: 10630.43,6176.46 10634.36,6175.01 10637.31,6173.19 10639.5,6171.16 10641.25,6168.82 10642.55,6166.19 10643.42,6163.32 10643.86,6160.26 10643.9,6157.05 10643.53,6153.72 10642.43,6149.2 10640.43,6144.08 10637.66,6139.06 10634.18,6134.25 10628.57,6128.28 10621.07,6122.28 10609.44,6115.4 10568.39,6095.2 10547.24,6080.49 10524.94,6060.01 10499.5,6031.55 10457.11,5980.84 10444.14,5968.22 10438.11,5963.95 10434.64,5962.33 10432.6,5961.83 10431.23,5961.76 10430.19,5961.92 10429.41,5962.19 10428.64,5962.63 10427.94,5963.25 10427.34,5964.03 10426.83,5964.97 10426.42,5966.06 10426.04,5967.77 10425.82,5970.01 10425.91,5973.51 10426.85,5979.82 10430.12,5991.43 10439.29,6012.86 10456.25,6042.17 10479.59,6074.17 10504.6,6102.59 10531.41,6128.23 10557.83,6149.15 10581.82,6164.21 10601.94,6173.28 10616.17,6176.89 10624.26,6177.35 10627.48,6177.05
cut-out: 10813.47,5805.61 10815.62,5802.18 10817.34,5798.03 10819.02,5791.47 10820.37,5779.78 10817.19,5726.24 10813.31,5705.89 10810.77,5698.78 10808.89,5695.58 10807.25,5693.75 10805.7,5692.59 10804.27,5691.87 10802.33,5691.3 10800.33,5691.04 10798.1,5691.04 10682.53,5732.81 10673.42,5737.79 10669.77,5740.6 10668.6,5741.86 10667.69,5743.21 10667.27,5744.21 10667.08,5745.12 10667.07,5745.88 10667.2,5746.71 10667.5,5747.57 10667.96,5748.42 10668.57,5749.28 10669.63,5750.44 10671.72,5752.22 10773.91,5804.59 10789.77,5810.38 10797.31,5811.76 10802.26,5811.75 10805.56,5811.1 10807.8,5810.25 10810.26,5808.79 10811.95,5807.34
cut-out: 7842.77,5805.61 7844.84,5807.85 7847.2,5809.6 7849.88,5810.84 7852.86,5811.6 7856.15,5811.87 7859.74,5811.68 7865,5810.75 7873.83,5808.04 7984.1,5752.54 7986.97,5750.08 7988.26,5748.46 7988.82,5747.38 7989.09,5746.48 7989.18,5745.73 7989.13,5744.91 7988.92,5744.06 7988.45,5743.03 7987.79,5742.05 7986.93,5741.06 7985.47,5739.72 7982.59,5737.64 7867.04,5692.66 7859.02,5691.11 7855.13,5691.11 7852.88,5691.55 7851.03,5692.31 7849.66,5693.2 7848.15,5694.6 7846.91,5696.21 7845.78,5698.14 7844.44,5701.19 7835.64,5768.65 7836.48,5786.7 7838.06,5795.21 7839.87,5800.56 7841.21,5803.27
cut-out: 8006.81,6157.46 8011.95,6158.29 8017.88,6158.25 8024.57,6157.29 8034.56,6154.54 8047.12,6149.41 8065.6,6139.31 8092.26,6120.5 8121.16,6095.13 8149.6,6064.87 8174.65,6032.56 8192.3,6004.55 8204.26,5980.02 8210.35,5961.05 8211.34,5954.46 8211.39,5950.42 8211.04,5947.93 8210.58,5946.37 8210.12,5945.38 8209.5,5944.47 8208.83,5943.8 8208.14,5943.34 8207.38,5943.01 8206.54,5942.81 8205.63,5942.75 8204.65,5942.82 8203.6,5943.03 8202.09,5943.51 8199.62,5944.68 8195.44,5947.4 8188.2,5953.58 8123.15,6029.4 8099.47,6053.4 8078.99,6069.72 8057.87,6082.21 8012.25,6106.21 8004.21,6113.88 7998.52,6121.82 7995.08,6129.37 7993.6,6135.49 7993.33,6140.42 7993.88,6144.58 7995.04,6148.02 7996.64,6150.79 7998.53,6152.98 8000.61,6154.68 8003.03,6156.08 8004.84,6156.84
cut-out: 8068.12,2823.01 8067.78,2823.82 8067.6,2824.68 8067.57,2825.6 8067.7,2826.57 8067.98,2827.59 8068.6,2829.04 8069.62,2830.78 8071.5,2833.28 8211.52,2934.2 8249.13,2966.12 8283.99,2997.26 8289.85,3000.89 8291.71,3001.63 8293.36,3002 8294.61,3002.04 8295.55,3001.89 8296.35,3001.59 8297.07,3001.15 8297.8,3000.47 8298.45,2999.61 8299,2998.55 8299.47,2997.31 8299.94,2995.38 8300.32,2991.88 8300.14,2985.37 8298.77,2976.4 8294.84,2962.16 8287.23,2943.88 8275.98,2924.27 8260.44,2903.85 8241.87,2885 8217.74,2865.98 8190.11,2849.18 8159.75,2835.16 8128.49,2824.74 8099.98,2818.93 8081.08,2818.08 8075.06,2818.93 8071.67,2820.05 8069.95,2821.03 8068.97,2821.86 8068.5,2822.42
cut-out: 8744.79,4136.51 8747.57,4146.22 8752.35,4155.79 8758.85,4164.99 8766.74,4173.58 8778.78,4183.72 8793.29,4192.8 8807.55,4198.94 8819.24,4201.69 8826.73,4202 8832.19,4201.21 8836.51,4199.72 8840.28,4197.58 8843.59,4194.85 8846.52,4191.65 8863.24,4166.45 8874.8,4153.52 8890.22,4137.21 8893.81,4131.46 8895.55,4126.94 8896.22,4123.41 8896.26,4119.42 8895.49,4115.19 8893.86,4110.87 8891.34,4106.51 8887.94,4102.18 8883.66,4097.96 8876.67,4092.62 8867.18,4087.24 8856.2,4082.79 8844.03,4079.51 8831.03,4077.59 8817.6,4077.14 8804.16,4078.25 8791.17,4080.9 8779.04,4085.06 8768.21,4090.64 8759.05,4097.5 8752.49,4104.64 8748.13,4111.72 8745.54,4118.53 8744.33,4124.92 8744.15,4130.67
cut-out: 8738.93,3829.37 8734.49,3828.25 8730.73,3828.06 8727.56,3828.53 8724.6,3829.6 8721.85,3831.26 8719.34,3833.47 8717.06,3836.23 8715.03,3839.49 8712.73,3844.59 8710.69,3851.23 8708.92,3861.41 8708.24,3874.28 8709.55,3893 8713.96,3914.95 8721.71,3937.36 8732.15,3957.76 8746.48,3977.72 8763.81,3995.46 8784.89,4011.95 8810.97,4028.23 8829.56,4037.56 8837.59,4040.3 8841.64,4040.95 8844,4040.89 8845.55,4040.56 8846.82,4040.02 8847.75,4039.4 8848.64,4038.52 8849.4,4037.42 8850.02,4036.08 8850.48,4034.53 8850.86,4032.09 8850.96,4028.84 8830.76,3962.33 8811.52,3921.2 8790.35,3883.84 8771.29,3856.78 8755.61,3839.99 8746.97,3833.37
cut-out: 8595.55,4023.76 8598.89,4037.23 8604.15,4048.33 8610.72,4057.21 8618.96,4064.82 8628.75,4070.95 8639.9,4075.44 8652.18,4078.17 8665.28,4079.06 8678.84,4078.14 8692.46,4075.52 8709.89,4069.74 8727.1,4061.05 8739.06,4052.29 8745.05,4045.88 8747.62,4041.71 8748.74,4038.71 8749.13,4036.29 8749.07,4034.12 8748.59,4032.01 8747.72,4029.96 8746.46,4027.95 8744.85,4025.97 8696.93,3986.24 8683.08,3967.35 8671.44,3945.08 8657.92,3910.53 8652.25,3897.99 8650.21,3895.15 8648.82,3893.85 8647.87,3893.26 8646.98,3892.91 8646.3,3892.78 8645.46,3892.76 8644.67,3892.89 8643.58,3893.26 8642.57,3893.8 8641.2,3894.81 8639.04,3896.91 8635.59,3901.26 8606.7,3958.24 8598.45,3983.62 8594.92,4005.34 8594.75,4014.68
cut-out: 8936.99,4312.46 8995.64,4356.91 9045.31,4391.76 9064.85,4403.14 9072.47,4406.29 9076.07,4407.1 9077.85,4407.16 9078.99,4407 9079.81,4406.71 9080.46,4406.34 9080.92,4405.93 9081.34,4405.4 9081.68,4404.76 9081.93,4404.01 9082.09,4403.17 9082.17,4401.89 9082.06,4400.24 9012.68,4274.07 8992.48,4245.35 8974.97,4224.95 8959.38,4211.56 8948.42,4205.24 8938.35,4201.76 8929.42,4200.53 8920.72,4200.99 8912.38,4202.96 8904.56,4206.24 8897.43,4210.6 8891.19,4215.8 8886.01,4221.62 8882.05,4227.86 8879.66,4233.72 8878.53,4239.14 8878.42,4244.65 8879.35,4250.27 8881.35,4256.01 8884.42,4261.89 8890.17,4270 8902.2,4282.94 8918.01,4297.07
cut-out: 8427.36,5167.16 8443.32,5169.44 8460.37,5168.74 8478.22,5165.18 8503.13,5156.5 8534.35,5141.62 8663.69,5067.39 8667.43,5063.55 8668.63,5061.73 8669.18,5060.44 8669.39,5059.51 8669.43,5058.83 8669.35,5058.04 8669.13,5057.34 8668.75,5056.6 8668.19,5055.87 8667.45,5055.17 8666.54,5054.5 8665.06,5053.67 8662.26,5052.54 8656.72,5051.09 8577.66,5050.53 8529.91,5056.18 8486.67,5064.66 8452.58,5074.64 8427.45,5085.28 8409.79,5096.07 8399.17,5105.59 8393.67,5112.88 8390.67,5118.95 8389.14,5124.35 8388.66,5129.65 8389.19,5134.8 8390.64,5139.74 8392.95,5144.44 8396.04,5148.84 8399.82,5152.91 8404.23,5156.59 8410.93,5160.87 8418.8,5164.49
cut-out: 8838.47,5090.88 8857.49,5086.26 8876.91,5077.71 8898.78,5063.89 8922.02,5044.67 8946.19,5019.92 8969.84,4990.75 8987.17,4964.85 8994.15,4950.7 8995.44,4945.88 8995.58,4943.47 8995.39,4942.08 8995.01,4940.94 8994.48,4940.01 8993.78,4939.22 8992.88,4938.52 8991.92,4938 8990.81,4937.57 8989.09,4937.12 8986,4936.74 8980.23,4936.73 8861.65,4959.92 8831.8,4970.3 8808.39,4981.87 8791.83,4993.69 8781.27,5004.57 8774.19,5015.37 8770.12,5025.48 8768.34,5034.68 8768.3,5043.82 8769.95,5052.68 8773.21,5061.08 8777.98,5068.81 8784.13,5075.68 8791.53,5081.52 8800.04,5086.16 8809.49,5089.45 8819.74,5091.29 8828.93,5091.65
cut-out: 8391.25,3034.41 8389.75,3033.9 8388.25,3033.66 8386.74,3033.69 8385.23,3033.99 8383.72,3034.54 8382.19,3035.36 8380.15,3036.84 8377.84,3039.03 8374.75,3042.77 8370.09,3050.04 8363.22,3064.19 8353.91,3091.12 8347.89,3119.54 8346.19,3144.79 8348.21,3166.62 8353.47,3186.35 8361.9,3204.92 8375.24,3224.91 8393.29,3244.71 8416.58,3264.49 8444.95,3283.66 8476,3300.31 8500.95,3310.29 8514.66,3313.51 8519.9,3313.72 8522.69,3313.3 8524.23,3312.75 8525.3,3312.13 8526.05,3311.51 8526.71,3310.7 8527.23,3309.75 8527.58,3308.67 8527.77,3307.45 8527.8,3306.11 8527.6,3304.13 8526.79,3300.73 8524.51,3294.7 8475.24,3207.75 8451.45,3159.75 8428.62,3106.3 8407.61,3056.18 8399.82,3042.44 8395.63,3037.45 8393.44,3035.64
cut-out: 8538.15,3687.99 8537.71,3696.31 8538.84,3705.39 8541.47,3715.13 8547.13,3728.97 8559.49,3750.91 8579.24,3778.45 8606.14,3809.97 8636.12,3840.16 8653.09,3853.82 8657.75,3856.27 8660.1,3856.96 8661.65,3857.09 8662.81,3856.96 8663.8,3856.65 8664.69,3856.16 8665.63,3855.39 8666.5,3854.4 8667.58,3852.76 8669.07,3849.64 8699.59,3778.19 8724.43,3727.57 8726.31,3719.04 8726.7,3712.88 8725.97,3706.39 8724.12,3700.6 8721.44,3695.57 8717.74,3690.71 8713.03,3686.03 8705.15,3680.08 8694.22,3673.85 8676.63,3666.48 8653.7,3659.8 8625.93,3654.99 8599.43,3653.7 8577.58,3655.87 8562.79,3660.09 8553.64,3664.78 8548.02,3669.17 8543.86,3673.9 8540.74,3679.26 8539.16,3683.47
cut-out: 8446.8,3434.39 8527.44,3558.67 8544.45,3577.52 8560.35,3590.44 8571.61,3596.54 8581,3599.56 8589.64,3600.59 8597.32,3600.05 8604.1,3598.35 8610.71,3595.52 8617.08,3591.59 8623.15,3586.61 8628.83,3580.63 8635.68,3571.26 8642.14,3559.07 8647,3545.48 8649.97,3530.89 8650.79,3515.73 8649.25,3500.39 8645.19,3485.28 8638.54,3470.73 8629.34,3457.05 8617.7,3444.44 8603.9,3433.04 8582.72,3419.83 8555.75,3407.42 8523.08,3396.38 8484.84,3386.99 8445.1,3380.37 8428.25,3379.39 8422.76,3380.05 8421.08,3380.58 8420.03,3381.08 8419.11,3381.74 8418.52,3382.37 8418.1,3383.02 8417.81,3383.74 8417.64,3384.64 8417.61,3385.64 8417.74,3386.73 8418.14,3388.34 8428.02,3406.03
cut-out: 8162.9,5429.74 8170.05,5426.16 8178.41,5420.3 8213.55,5385.52 8242.61,5348.98 8267.7,5311.76 8287.25,5276.83 8299.98,5247.4 8306.59,5224.06 8308.37,5207.89 8307.57,5197.32 8305.46,5189.65 8302.78,5184.24 8299.63,5180.02 8295.8,5176.41 8291.3,5173.44 8286.17,5171.1 8280.44,5169.39 8271.93,5168.08 8261.31,5167.88 8245.78,5169.58 8220.64,5175.85 8192.44,5186.89 8164.79,5201.81 8144.5,5216.45 8130.41,5230.42 8122.67,5241.71 8118.76,5250.79 8116.91,5258.93 8116.44,5267.09 8117.15,5275.33 8133.19,5333.52 8138.8,5365.96 8145.56,5420.72 8147.52,5425.24 8149.17,5427.6 8150.6,5428.98 8152.08,5429.95 8153.69,5430.61 8155.51,5430.97 8157.3,5431.01 8159.24,5430.77 8161.02,5430.36
cut-out: 8342.42,3818.26 8344.64,3828.29 8349,3838.57 8355.42,3848.99 8366.94,3862.95 8383.44,3878.45 8409.25,3897.73 8442.05,3917.46 8479.61,3935.75 8512.75,3948.44 8538.88,3955.31 8552.65,3956.7 8558.14,3956.28 8561.54,3955.46 8563.7,3954.57 8565.68,3953.32 8567.18,3951.9 8568.26,3950.43 8569.1,3948.77 8569.71,3946.92 8570.1,3944.88 8570.31,3941.89 8570.03,3936.83 8549.4,3841.45 8542.92,3808.66 8536.28,3789.85 8529.02,3777.48 8521.1,3768.57 8512.36,3761.75 8502.08,3756.16 8490.33,3751.87 8477.26,3748.93 8458.24,3747.16 8435.5,3748.09 8411.76,3752.27 8389.73,3759.43 8371.47,3768.73 8359.08,3778.12 8351.08,3786.99 8346.37,3794.79 8343.58,3802.22 8342.25,3810 8342.14,3814.1
cut-out: 8006.81,3181.22 8006.43,3183.52 8006.5,3185.82 8007,3188.13 8007.95,3190.45 8009.32,3192.76 8011.12,3195.08 8014.16,3198.18 8020.07,3202.84 8031.74,3209.93 8172.58,3274.15 8208.83,3295.62 8241.63,3319.36 8270.07,3344.23 8305.72,3378.09 8311.34,3381.72 8314.01,3382.75 8315.66,3383.04 8316.94,3383.03 8318.05,3382.8 8318.92,3382.46 8319.92,3381.84 8320.78,3381.08 8321.58,3380.14 8322.33,3379.01 8323.23,3377.21 8324.38,3373.91 8325.65,3367.59 8326.47,3355.25 8324.89,3331.17 8319.43,3302.73 8310.44,3274.61 8298.66,3249.13 8284.61,3226.81 8268.54,3207.53 8250.53,3191.06 8228.18,3175.76 8203.32,3163.54 8175.98,3154.47 8146.43,3148.73 8115.31,3146.56 8083.95,3148.1 8054.73,3153.2 8033,3160.14 8019.08,3167.23 8012.47,3172.39 8009.99,3175.12 8008.01,3178.14 8007.31,3179.68
cut-out: 8273.93,5897.07 8290.01,5884.16 8311.97,5861.41 8340.56,5826.79 8379.3,5774.84 8394.84,5750.09 8407.26,5724.06 8414.9,5699.76 8419.12,5674.9 8420.07,5649.38 8417.7,5624.66 8412.4,5603.37 8405.96,5588.9 8399.87,5580.25 8394.61,5575.29 8389.8,5572.3 8385.14,5570.57 8380.7,5569.84 8376.5,5569.89 8372.14,5570.62 8367.61,5572.06 8362.92,5574.22 8356.47,5578.23 8348.95,5584.29 8338.58,5594.87 8322.59,5615.76 8303.73,5646.93 8283.59,5687.86 8264.05,5736.27 8247.96,5786.18 8238.52,5825.8 8234.22,5856.68 8234.15,5878.42 8236.26,5890.11 8237.99,5894.77 8240.35,5898.84 8242.65,5901.45 8244.78,5903.08 8246.86,5904.16 8249.08,5904.87 8251.42,5905.23 8253.88,5905.26 8256.45,5904.96 8260.03,5904.1 8264.23,5902.51 8269.01,5900.11
cut-out: 8398.74,5298.99 8480.27,5303.53 8529.21,5303.1 8570.75,5299.18 8606.08,5292.32 8637.8,5282.73 8666.77,5270.5 8693.19,5255.83 8716.77,5239.06 8736.82,5220.93 8752.33,5202.69 8762.46,5185.98 8766.7,5174.61 8767.89,5167.55 8767.81,5162.14 8766.96,5158 8765.57,5154.59 8763.58,5151.51 8760.99,5148.78 8757.77,5146.41 8753.95,5144.43 8749.5,5142.85 8742.62,5141.38 8733.6,5140.61 8719.52,5141.08 8694.36,5144.92 8657.29,5154.52 8608.02,5171.32 8544.62,5196.8 8466.79,5231.6 8393.94,5267.03 8369.64,5280.8 8363.03,5285.76 8360.99,5287.98 8360.36,5288.99 8360.07,5289.7 8359.96,5290.2 8359.93,5290.72 8360,5291.18 8360.12,5291.55 8360.37,5292.03 8360.69,5292.43 8361.1,5292.82 8361.77,5293.3 8375.02,5296.69
cut-out: 7717.66,5559.53 7721.11,5561.32 7725.36,5562.68 7730.4,5563.59 7738.3,5564.12 7752.56,5563.43 7778.73,5559.07 7816.1,5548.77 7859.66,5532.44 7899.69,5513.67 7936.99,5492.51 7969.61,5470.26 7996.78,5447.81 8018.48,5425.76 8035.06,5404.44 8047.02,5384 8054.84,5364.59 8059.1,5344.5 8059.33,5328.16 8056.92,5315.3 8053.41,5306.39 8049.06,5299.45 8044.35,5294.37 8039.56,5290.79 8034.28,5288.16 8028.57,5286.52 8022.45,5285.88 8015.95,5286.23 8009.06,5287.56 7999.29,5290.84 7987.47,5296.5 7939.84,5329.82 7869.05,5388.92 7781.1,5465.03 7747.71,5496.66 7726.46,5520.26 7716.22,5535.46 7713.51,5541.51 7712.37,5545.62 7712.03,5548.45 7712.18,5551.29 7712.71,5553.45 7713.55,5555.28 7714.71,5556.94 7716.05,5558.31
cut-out: 7891.11,2842.23 7891.9,2845.02 7893.39,2848.3 7938,2909.83 7953.81,2936.05 7964.26,2959.67 7970.62,2983.15 7973.31,3006.44 7975.53,3036.41 7977.51,3044.72 7980.74,3052.32 7985.15,3058.81 7990.64,3064.37 7997.63,3069.46 8006.17,3074.09 8019.97,3079.49 8045.45,3085.86 8079.93,3090.36 8119.87,3091.52 8154.49,3089.14 8182.77,3083.98 8203.12,3077.05 8214.23,3070.83 8220.59,3065.46 8224.53,3060.53 8226.84,3056.12 8228.15,3051.93 8228.72,3047.53 8228.57,3042.92 8227.69,3038.13 8226.08,3033.16 8222.85,3026.27 8217.77,3018.19 8208.72,3006.94 8190.72,2989.27 8161.85,2966.29 8121.47,2939.12 8069.18,2908.44 8008.72,2877.16 7956.68,2853.64 7919.44,2839.96 7901.67,2836.03 7896.78,2835.97 7894.55,2836.39 7893.62,2836.74 7892.76,2837.22 7892.12,2837.77 7891.7,2838.3 7891.35,2838.95 7891.12,2839.7 7891.01,2840.53 7891.01,2841.34
cut-out: 8489.8,5559.53 8504.14,5558.59 8514.62,5555.82 8523.51,5551.66 8531.74,5546.01 8539.43,5538.95 8549.09,5527.5 8562.99,5506.58 8631.38,5391.82 8643.22,5371.07 8646.76,5362.52 8648.01,5357.06 8648.1,5354.15 8647.76,5351.98 8647.17,5350.35 8646.31,5348.9 8645.12,5347.57 8643.78,5346.52 8642.19,5345.61 8640.33,5344.83 8637.44,5344.01 8632.19,5343.23 8622.27,5343.06 8564.49,5352 8495.87,5368.29 8344.62,5408.65 8294.36,5424.22 8278.19,5431.2 8272.19,5435.01 8269.4,5437.6 8267.95,5439.57 8267.16,5441.24 8266.82,5442.51 8266.69,5444.08 8266.83,5445.57 8267.23,5447.09 8267.88,5448.65 8269.13,5450.8 8271.03,5453.31 8375.84,5519.13 8420.49,5540.45 8451.64,5552.21 8471.71,5557.41
cut-out: 7583.93,6003.5 7594.24,6001.02 7605.63,5996.26 7622.26,5986.5 7642.49,5971.15 7669.42,5945.97 7698.28,5913.43 7723.39,5879.95 7745.2,5845.47 7762.14,5812.67 7773.7,5783.37 7780.19,5758.33 7782.33,5737.59 7781.22,5722.33 7778.32,5711.21 7774.25,5702.52 7768.89,5695.1 7762.35,5688.95 7754.76,5684.06 7746.27,5680.41 7737.04,5677.95 7727.21,5676.65 7713.48,5676.62 7697.59,5678.77 7681.71,5683.06 7666.26,5689.31 7651.54,5697.4 7637.77,5707.26 7625.04,5718.84 7609.7,5736.9 7594.57,5760.66 7580.39,5790.31 7566.95,5827.47 7555.15,5871.58 7548.12,5910.99 7545.65,5943.42 7547.06,5967.16 7550.67,5981.98 7554.43,5990.03 7557.99,5994.94 7561.85,5998.57 7565.8,6001.05 7570.2,6002.77 7575.03,6003.7 7579.34,6003.87
cut-out: 8182.49,3706.74 8182.86,3711.34 8183.91,3715.22 8185.46,3718.49 8187.58,3721.55 8190.28,3724.38 8193.56,3726.99 8197.41,3729.36 8203.42,3732.13 8211.34,3734.72 8223.69,3737.25 8245.67,3738.95 8276.86,3737.43 8308.64,3732.35 8340.93,3723.79 8371.08,3712.37 8397.32,3698.89 8418.88,3684.15 8435.61,3668.76 8447.81,3653.15 8455.65,3638.16 8459.94,3624.05 8461.45,3610.95 8460.65,3597.59 8457.53,3584.06 8452.13,3570.47 8444.53,3556.95 8431.25,3539.23 8411.29,3518.88 8385.46,3498.07 8354.21,3477.74 8319.8,3459.73 8290.2,3447.73 8266.91,3441.43 8257.95,3440.35 8252.36,3440.39 8248.8,3440.91 8245.53,3441.94 8243.3,3443.16 8241.77,3444.43 8240.65,3445.76 8239.75,3447.28 8239.08,3448.96 8238.61,3450.82 8238.29,3453.55 8238.31,3456.96 8251.13,3511.75 8253.79,3534.56 8252.93,3556 8248.15,3578.69 8239.31,3601.73 8225.79,3626.68 8187.52,3687.83 8184.29,3696.16 8182.97,3701.6
cut-out: 7933.6,5550.81 7876.97,5573.9 7848.94,5587.68 7836.52,5596.22 7832.27,5600.54 7830.1,5603.78 7829.08,5606.21 7828.65,5608.03 7828.54,5610.04 7828.8,5612.11 7829.46,5614.19 7830.52,5616.28 7831.98,5618.4 7834.57,5621.24 7838.35,5624.47 7844.84,5628.85 7883.49,5645.75 7926.57,5658.43 7974.81,5668.85 8024.06,5675.95 8069.08,5679.02 8108.15,5678.34 8141.19,5674.5 8168.72,5668.07 8191.37,5659.52 8209.81,5649.19 8224.55,5637.35 8235.04,5625.44 8242.9,5612.62 8248.18,5599.17 8250.97,5585.41 8251.38,5571.66 8249.58,5558.24 8245.71,5545.44 8239.94,5533.54 8232.46,5522.78 8223.4,5513.35 8212.92,5505.4 8201.16,5499 8188.23,5494.19 8174.24,5490.98 8154.14,5489.12 8127.37,5490.35 8095.48,5495.74 8056.33,5506.19 7994.16,5527.6
cut-out: 7823.54,5932.32 7822.11,5943.94 7822.83,5955.6 7825.65,5967.2 7830.5,5978.6 7837.27,5989.68 7845.84,6000.3 7859.78,6013.52 7878.42,6026.73 7902.29,6038.93 7925.86,6047.12 7950.17,6052.14 7974.15,6053.77 7997.04,6052.07 8018.39,6047.24 8038.06,6039.49 8057.99,6027.58 8076.08,6012.18 8092.58,5993.01 8107.66,5969.62 8121.41,5941.4 8133.81,5907.75 8144.56,5868.83 8151.02,5834.23 8151.9,5815.03 8150.93,5808 8149.54,5803.51 8148.09,5800.56 8145.84,5797.47 8143.23,5795.06 8140.11,5793.08 8136.45,5791.52 8132.22,5790.35 8125.7,5789.38 8113.93,5789.13 8091.85,5791.19 8051.43,5798.77 8002.77,5811.54 7954.74,5827.75 7915.06,5844.79 7884.28,5861.66 7861.18,5878.07 7844.46,5893.92 7833,5909.2 7827.18,5920.64
cut-out: 7780.95,3259.91 7777.38,3264.68 7774.73,3269.92 7772.98,3275.62 7772.14,3281.76 7772.2,3288.33 7773.14,3295.3 7775.74,3305.19 7780.41,3317.08 7808.03,3361.43 7835.35,3394.47 7873.8,3434.98 7924.86,3483.48 7984.83,3535.38 8025.6,3566.86 8054.25,3585.56 8077.88,3597.27 8096.31,3602.82 8108.77,3604.12 8119.61,3603.21 8128.81,3600.63 8136.63,3596.89 8143.99,3591.82 8150.86,3585.46 8157.2,3577.85 8162.92,3569.05 8169.48,3555.59 8175.12,3538.33 8178.62,3519.12 8179.64,3498.35 8177.58,3474.63 8172.13,3450.75 8163.29,3427.05 8151.04,3403.74 8133.35,3378.44 8111.22,3353.87 8084.54,3330.26 8053.37,3307.99 8018.11,3287.65 7979.67,3269.99 7939.65,3255.86 7904.15,3246.82 7871.17,3241.63 7842.46,3240.26 7819.08,3242.25 7801.23,3246.87 7790.75,3251.88 7785.41,3255.65
cut-out: 4421.83,2537.97
cut-out: 6796.86,2361.99
cut-out: 6762.94,2345.49
cut-out: 6776.62,2388.46
cut-out: 3954.37,2373.44

## Design rules (kind name [scope] priority, off if disabled: settings)
BoardOutlineClearance [All] p1: gap=8 ignorepadtopadclearanceinfootprint=FALSE
Clearance "Polygon clearance" [InPolygon] p1: gap=5 ignorepadtopadclearanceinfootprint=FALSE
Clearance [All] p2: gap=3.5 ignorepadtopadclearanceinfootprint=FALSE
DiffPairsRouting [All] p1: maxlimit=10 minlimit=10 mostfreqgap=10 toplayer_minwidth=15 toplayer_maxwidth=15 toplayer_prefwidth=15 midlayer1_minwidth=15 midlayer1_maxwidth=15 midlayer1_prefwidth=15 midlayer2_minwidth=15 midlayer2_maxwidth=15 midlayer2_prefwidth=15 bottomlayer_minwidth=15 bottomlayer_maxwidth=15 bottomlayer_prefwidth=15 maxuncoupledlength=500
PlaneClearance [All] p1: clearance=15
PolygonConnect [All] p1: connectstyle=Direct reliefconductorwidth=10 reliefentries=4 polygonreliefangle="90 Angle" airgapwidth=10
RoutingVias [All] p1: holewidth=7.87 width=15.75 viastyle="Through Hole" minholewidth=7.87 minwidth=11.81 maxholewidth=78.74 maxwidth=196.85
SolderMaskExpansion [All] p1: expansion=4
Width [All] p1: maxlimit=50 minlimit=3.5 preferedwidth=8
28 further rules are at their usual default settings.

## Classes and differential pairs
net class UART: U0RXD U0TXD
differential pair D: +D_P -D_N

## Components (designator, comment, footprint, x,y, rotation, side; value= is the part's Value field where it differs from the comment)
ANT1 "2.4 GHz Ant" 2450AT18A100E 9062.99,4665.35 r115 top
C1 "Capacitor" "0402 - Capacitor" 9475,4776 r0 top value=100p
C2 "Capacitor" "0402 - Capacitor" 9350,4799 r90 top value=1u
C3 "Capacitor" "0402 - Capacitor" 9387,4412 r270 top value=0.1u
C4 "Capacitor" "0402 - Capacitor" 9562,4753 r90 top value=0.1u
C5 "Capacitor" "0402 - Capacitor" 9527,4461 r270 top value=1u
C6 "Capacitor" "0402 - Capacitor" 9287,4779 r90 top value=0.1u
C7 "Capacitor" "0402 - Capacitor" 9217.35,4398.52 r180 bottom value=1u
C8 "Capacitor" "0603 - Capacitor" 9335,4392 r90 top value=10u
C9 "Capacitor" "0402 - Capacitor" 9281,4415 r270 top value=1u
C10 "Capacitor" "0402 - Capacitor" 9239,4415 r270 top value=0.1u
C11 "Capacitor" "0402 - Capacitor" 9312,4510 r90 bottom value=2.2u
C12 "Capacitor" "0402 - Capacitor" 9327.35,4917 r0 top value="3.3n 10%"
C13 "Capacitor" "0402 - Capacitor" 9269.35,4940 r90 top value="10n 10%"
C14 "Capacitor" "0402 - Capacitor" 9250,4714 r90 top value=TBD
C15 "Capacitor" "0402 - Capacitor" 9178,4604 r315 top value=TBD
C17 "Capacitor" "0402 - Capacitor" 9475,4813 r0 top value=22p
C18 "Capacitor" "0402 - Capacitor" 9388,4898 r90 top value=22p
C19 "Capacitor" "0603 - Capacitor" 9417,3734 r270 bottom value=4.7u
C20 "Capacitor" "0603 - Capacitor" 9267,3969 r180 bottom value=10u
C24 "Capacitor" "0402 - Capacitor" 9432,4995 r0 bottom value=0.1u
C25 "Capacitor" "0402 - Capacitor" 9479,4924 r90 bottom value=1u
C26 "Capacitor" "0402 - Capacitor" 9259,5054 r270 bottom value=47p
C27 "Capacitor" "0402 - Capacitor" 9386,5054 r270 bottom value=47p
C28 "Capacitor" "0402 - Capacitor" 9439,3879 r90 top value=0.1u
C29 "Capacitor" "0402 - Capacitor" 9220,3840 r90 top value=0.1u
C30 "Capacitor" "0402 - Capacitor" 9186,3959 r270 top value=0.1u
C31 "Capacitor" "0402 - Capacitor" 9325,3469 r0 top value=0.1u
C32 "Capacitor" "0402 - Capacitor" 9326,3300 r270 top value=0.1u
C33 "Capacitor" "0402 - Capacitor" 9289,3958 r270 top value=0.1u
C34 "Capacitor" "0402 - Capacitor" 9390,3958 r270 top value=0.1u
C35 "Capacitor" "0402 - Capacitor" 9254,3648 r90 top value=0.1u
C36 "Capacitor" "0402 - Capacitor" 9400,3582 r270 top value=0.1u
C37 "Capacitor" "0402 - Capacitor" 9489,3959 r270 top value=0.1u
D1 "Diode" "SOD 923" 9214,3889 r0 bottom
D2 "Diode" "SOD 923" 9324,3492 r0 bottom
IC1 "ESP32-D2WD" "ESP32 QFN35P500X500X90_HS-49N" 9409,4612 r0 top locked
IC2 "LM3671" "SOT 23 - 5" 9310,3741 r0 bottom
IC3 "VCNL4040" VCNL4040M3OE 9326.77,4377.95 r180 bottom
IC4 "FT231X" QFN20-127P600-8N 9343.63,4882.82 r0 bottom
IC5 "PRTR5V0U2F" SOT886 9319,5139 r270 bottom
IC6 "PBSS4260PAN" DFN2020-6 9510,4659 r90 bottom
IC8 "BMI160" BMI160 9340,3799 r90 top
IC9 "W25Q80DV" "8 - Pad USON 2x3mm" 9177,4084 r270 top
IC10 "BMM150" BMM150 9327,3394 r90 top
IC11 "W25Q80DV" "8 - Pad USON 2x3mm" 9278.33,4084 r270 top
IC12 "W25Q80DV" "8 - Pad USON 2x3mm" 9379.67,4084 r270 top
IC13 "BMP388" BMP388 9332,3616 r90 top
IC14 "W25Q80DV" "8 - Pad USON 2x3mm" 9481,4084 r270 top
L1 "Inductor" "0402 - inductor" 9259,4612 r270 top value=2n
L2 "Inductor" "0402 - inductor" 9198,4662 r45 top value=TBD
L3 "Inductor" MDMK2020 9311,3874 r180 bottom value=2.2u
LD1 "Led" "0402 - Led" 9563.22,4858.79 r0 bottom
LD2 "Led" "0402 - Led" 9564.22,4806.91 r0 bottom
LD3 "1" "0404 RGD Led" 9253,5368 r0 top locked
LD4 "1" "0404 RGD Led" 9408,5368 r90 top locked
LD5 "Led" "0603 - led" 8397,2992 r0 top
LD6 "Led" "0603 - led" 10273,2985 r180 top
LD7 "Led" "0603 - led" 7562,6166 r270 top
LD8 "Led" "0603 - led" 11119,6166 r270 top
LD9 "Led" "0603 - led" 10933,3312 r270 top
LD10 "Led" "0603 - led" 7724,3291 r270 top
N1 "N-MOSFET" DFN1006-3 7673,5511 r270 top
N2 "N-MOSFET" DFN1006-3 10007,3406 r90 top
N3 "N-MOSFET" DFN1006-3 10986,5511 r270 top
N4 "N-MOSFET" DFN1006-3 8658,3406 r90 top
N5 "N-MOSFET" DFN1006-3 9304.33,5194 r270 top locked
N6 "N-MOSFET" DFN1006-3 9249.22,5194 r270 top locked
N7 "N-MOSFET" DFN1006-3 9194.1,5194 r270 top locked
N8 "N-MOSFET" DFN1006-3 9359.45,5194 r270 top locked
N9 "N-MOSFET" DFN1006-3 9414.57,5194 r270 top locked
N10 "N-MOSFET" DFN1006-3 9469.69,5194 r270 top locked
R1 "Resistor" "0402 - Resistor" 9463,4412 r90 top value=3.3k
R2 "Resistor" "0402 - Resistor" 9425,4412 r90 top value=3.3k
R3 "Resistor" "0402 - Resistor" 9327.35,4878 r0 top value=20k
R4 "Resistor" "0402 - Resistor" 9696,4691 r180 top value=499
R5 "Resistor" "0402 - Resistor" 9217.35,4440.52 r0 bottom value=22
R6 "Resistor" "0402 - Resistor" 9388,4823 r270 top value=0
R7 "Resistor" "0402 - Resistor" 9300.33,5054.5 r90 bottom value=27
R8 "Resistor" "0402 - Resistor" 9342.67,5054.5 r90 bottom value=27
R9 "Resistor" "0402 - Resistor" 9483.09,4858.28 r180 bottom value=2k
R10 "Resistor" "0402 - Resistor" 9483.25,4806.4 r180 bottom value=2k
R11 "Resistor" "0402 - Resistor" 9303.83,5274.91 r270 top locked value=475
R12 "Resistor" "0402 - Resistor" 9248.72,5274.91 r270 top locked value=100
R13 "Resistor" "0402 - Resistor" 9193.6,5274.91 r270 top locked value=100
R14 "Resistor" "0402 - Resistor" 9358.95,5274.9 r270 top locked value=475
R15 "Resistor" "0402 - Resistor" 9414.07,5274.91 r270 top locked value=100
R16 "Resistor" "0402 - Resistor" 9469.19,5274.9 r270 top locked value=100
R17 "Resistor" "0402 - Resistor" 8502,3093 r90 top value=475
R18 "Resistor" "0402 - Resistor" 10185,3081 r90 top value=475
R19 "Resistor" "0402 - Resistor" 7497,5979 r270 top value=100
R20 "Resistor" "0402 - Resistor" 11169,5979 r270 top value=100
R21 "Resistor" "0402 - Resistor" 10742,3205 r180 top value=100
R22 "Resistor" "0402 - Resistor" 7906,3198 r0 top value=100
R23 "Resistor" "0402 - Resistor" 9503,4568 r270 bottom value=10k
R24 "Resistor" "0402 - Resistor" 9403,4707 r90 bottom value=10k
R25 "Resistor" "0402 - Resistor" 9326,4613 r90 bottom value=10k
SP1 "Signal Point" Signal_point_1mm 9136,4138 r90 bottom value=DNP
SP1 "Signal Point" Signal_point_2mm 8280,5977 r0 top value=DNP
SP2 "Signal Point" Signal_point_1mm 9518,4139 r90 bottom value=DNP
SP2 "Signal Point" Signal_point_2mm 10546,3678 r0 top value=DNP
SP3 "Signal Point" Signal_point_2mm 7649,5605 r0 top value=DNP
SP4 "Signal Point" Signal_point_2mm 10059,3324 r0 top value=DNP
SP5 "Signal Point" Signal_point_2mm 10369,5967 r0 top value=DNP
SP6 "Signal Point" Signal_point_2mm 8121,3682 r0 top value=DNP
SP7 "Signal Point" Signal_point_2mm 11025,5609 r0 top value=DNP
SP8 "Signal Point" Signal_point_2mm 8604,3324 r0 top value=DNP
SP15 "Signal Point" Signal_point_1mm 9373,3543 r90 bottom value=DNP
SP16 "Signal Point" Signal_point_1mm 9279,3542 r90 bottom value=DNP
Y1 "XTAL_4" "XTAL 1.6X1.2MM 4-SMD" 9444,4860 r180 top value="40 MHz"
Z1 "USB MICROB" "USB - microB" 9331.76,5334 r0 bottom

## Footprints (in the part's own frame and the unit in brackets; to place one, negate y for a bottom-side part, rotate by r counter-clockwise, add the part's x,y. Pads: shape width x height; smd on the part's side, far side on the other; paste and mask are expansions set on the pad)
"8 - Pad USON 2x3mm" [mm]
  rect 0.9x0.25 smd: 1(-1.495,0.75) 2(-1.495,0.25) 3(-1.495,-0.25) 4(-1.495,-0.75) 5(1.495,-0.75) 6(1.495,-0.25) 7(1.495,0.25) 8(1.495,0.75)
  silkscreen extent -1.97,-1.17 1.55,1.23, body extent -1.57,-1.05 1.57,1.05, height 0.6
"0402 - Capacitor" [mm]
  rect 0.5x0.7 smd: 1(0.55,0) 2(-0.55,0)
  silkscreen extent -0.89,-0.43 0.89,0.43, body extent -0.52,-0.27 0.53,0.28, height 0.55
"0402 - inductor" [mm]
  rect 0.5x0.7 smd: 1(0.55,0) 2(-0.55,0)
  silkscreen extent -0.89,-0.43 0.89,0.43, body extent -0.5,-0.3 0.5,0.3, height 0.2
"0402 - Led" [mm]
  rect 0.5x0.7 smd: 1(0.55,0) 2(-0.55,0)
  silkscreen extent -0.89,-0.43 0.89,0.43, body extent -0.5,-0.25 0.5,0.25, height 0.16
"0402 - Resistor" [mm]
  rect 0.5x0.7 smd: 1(0.55,0) 2(-0.55,0)
  silkscreen extent -0.89,-0.43 0.89,0.43, body extent -0.53,-0.28 0.53,0.28, height 0.4
"0404 RGD Led" [mm]
  rect 0.5x0.5 smd: 1(0.4,0.4) 2(0.4,-0.4) 3(-0.4,-0.4) 4(-0.4,0.4)
  body extent -0.5,-0.5 0.5,0.5, height 0.65
"0603 - Capacitor" [mm]
  rect 0.9x1 smd: 1(-0.95,0) 2(0.95,0)
  silkscreen extent -1.6,-0.7 1.6,0.7, body extent -0.85,-0.45 0.85,0.45, height 0.9
"0603 - led" [mm]
  rect 0.9x1 smd: 1(-0.95,0) 2(0.95,0)
  silkscreen extent -1.6,-0.7 2.1,0.7, body extent -0.8,-0.39 0.8,0.39, height 0.7
2450AT18A100E [mm]
  rect 1x1.5 smd: 1(-1.6,0) 2(1.6,0)
  silkscreen extent -1.6,-0.8 1.6,0.8, body extent -1.8,-0.5 1.8,0.5, height 1
BMI160 [mm]
  oval 1x0.25 smd: 1(-1.45,0.75) 2(-1.45,0.25) 3(-1.45,-0.25) 4(-1.45,-0.75) 8(1.45,-0.75) 9(1.45,-0.25) 10(1.45,0.25) 11(1.45,0.75)
  oval 0.25x1 smd: 5(-0.5,-1.2) 6(0,-1.2) 7(0.5,-1.2) 12(0.5,1.2) 13(0,1.2) 14(-0.5,1.2)
  silkscreen extent -1.7,-1.45 1.7,1.9, body extent -1.6,-1.35 1.6,1.35, height 1
BMM150 [mm]
  round 0.2 smd mask+0.05: A1(0.566,0.566) A3(0.566,0) A5(0.566,-0.566) B2(0.283,0.283) B4(0.283,-0.283) C1(0,0.566) C5(0,-0.566) D2(-0.283,0.283) D4(-0.283,-0.283) E1(-0.566,0.566) E3(-0.566,0) E5(-0.566,-0.566)
  silkscreen extent -0.8,-0.8 0.95,1.07, body extent -0.8,-0.8 0.76,0.76, height 0.8
BMP388 [mm]
  rect 0.25x0.275 smd mask+0.05: 1(0.25,0.763) 2(-0.25,0.763) 6(-0.25,-0.763) 7(0.25,-0.763)
  rect 0.275x0.25 smd mask+0.05: 3(-0.763,0.5) 4(-0.763,0) 5(-0.763,-0.5) 8(0.763,-0.5) 9(0.763,0) 10(0.763,0.5)
  silkscreen extent -1,-1 1,1.34, body extent -1,-1 1,1, height 0.4
DFN1006-3 [mm]
  rect 0.4x0.25 smd: 1(0.35,0.225) 2(0.35,-0.225)
  rect 0.4x0.7 smd: 3(-0.35,0)
  body extent -0.52,-0.32 0.53,0.33, height 0.4
DFN2020-6 [mm]
  rect 0.35x0.3 smd mask+0.05: 1(-0.65,-0.875) 2(0,-0.875) 3(0.65,-0.875) 4(0.65,0.875) 5(0,0.875) 6(-0.65,0.875)
  rect 0.72x1.05 smd mask+0.05: 3(0.49,0) 6(-0.49,0)
  silkscreen extent -1,-1 1,1, body extent -1,-1 1,1, height 0.65